# Altium PCB CopterControl.PcbDoc (part 1 of 2)
Units mil, origin at the board's own origin, x right, y up, seen from the top; angles counter-clockwise.
Board outline 1417.32 x 1417.32 mil, 4 copper layers (Top Layer, Ground, Power, Bottom Layer); 93 components, 79 nets, 390 pads, 96 vias.
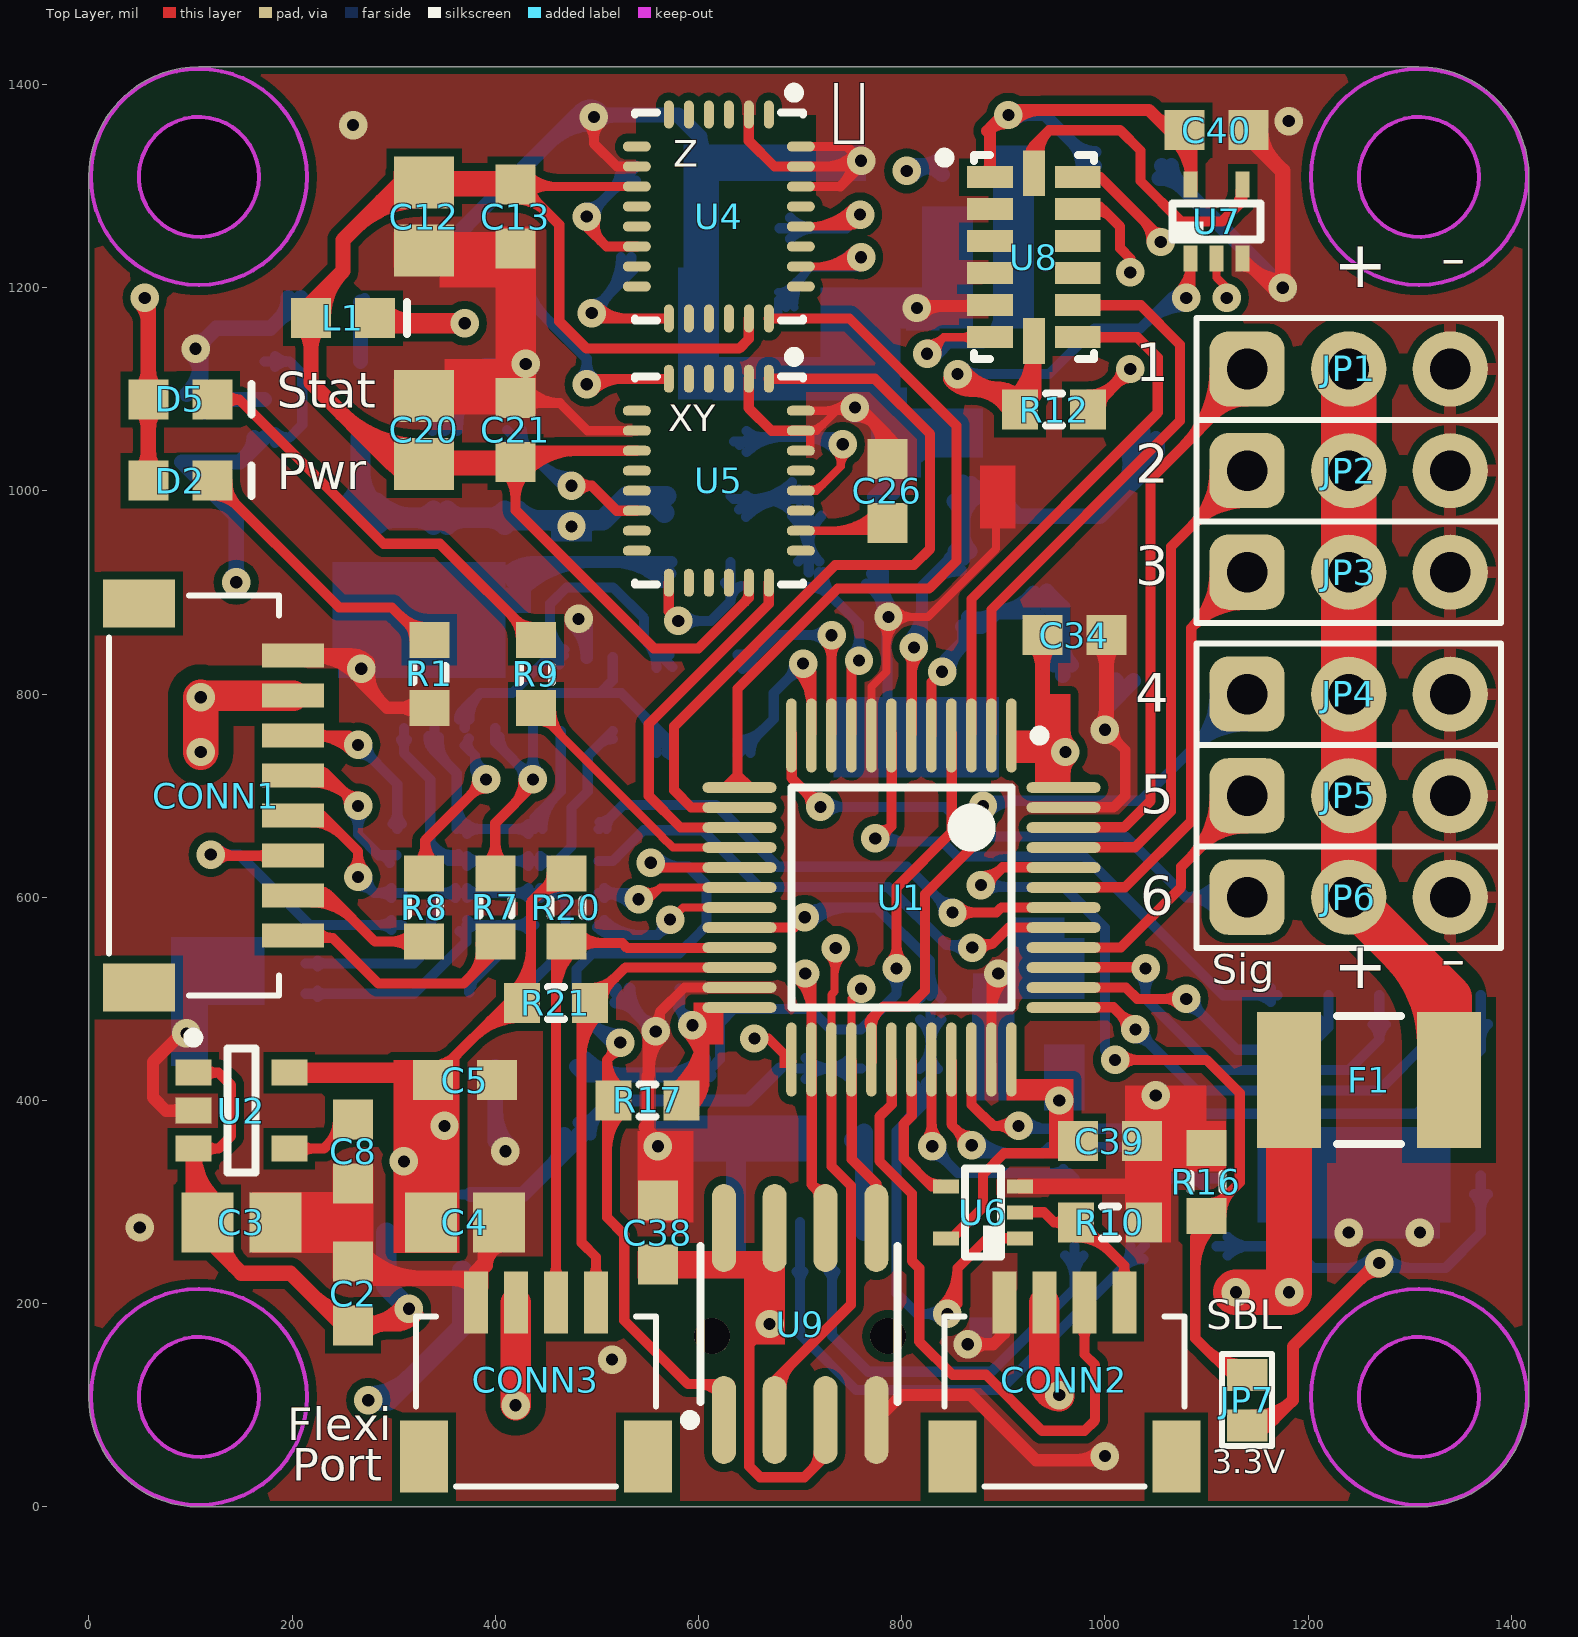
[diagram p0: Top Layer view]
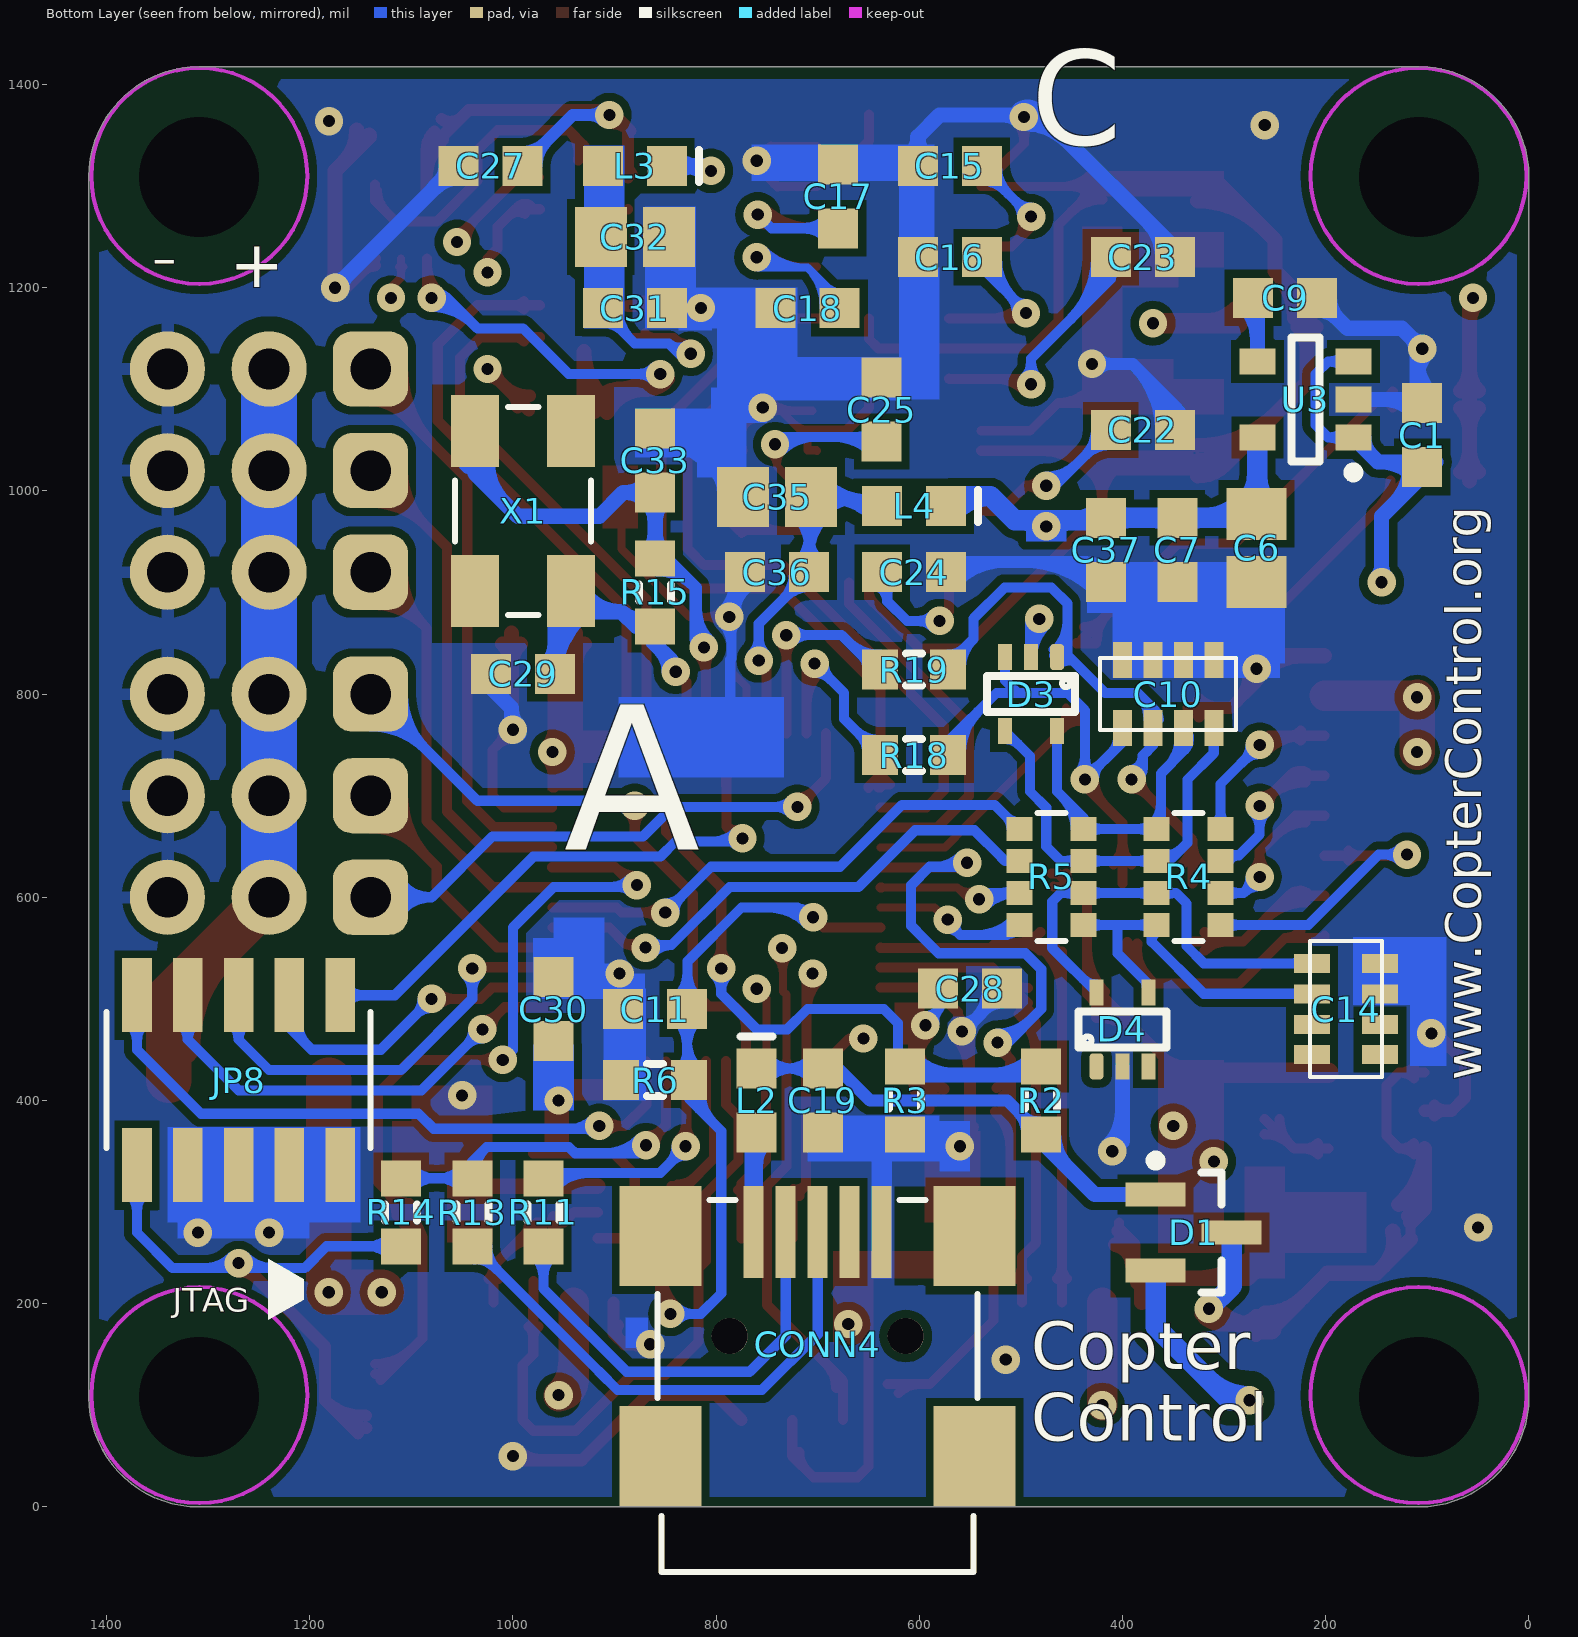
[diagram p1: Bottom Layer view, seen from below]
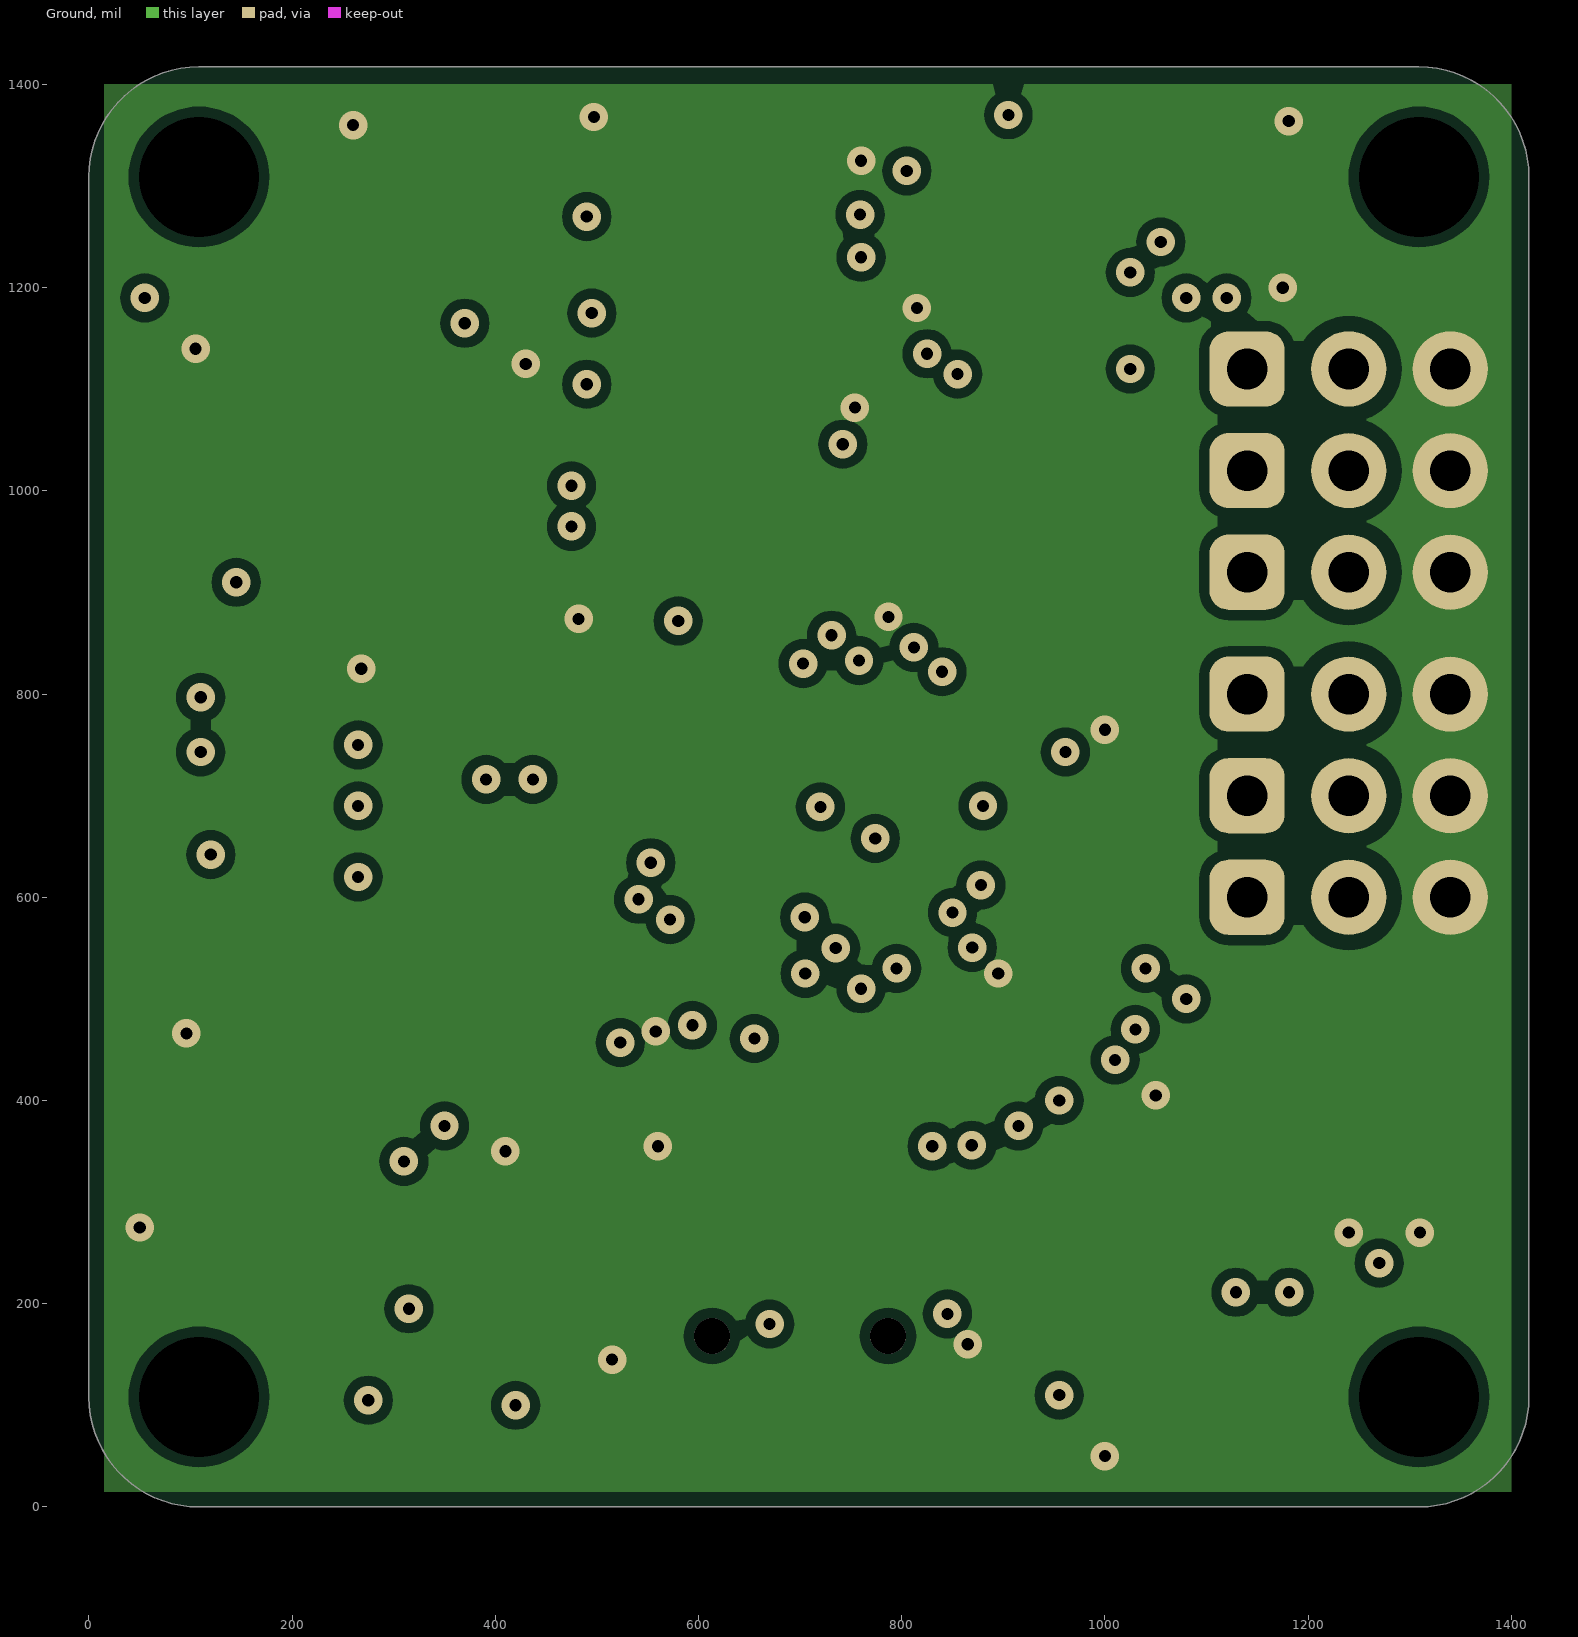
[diagram p2: Ground]
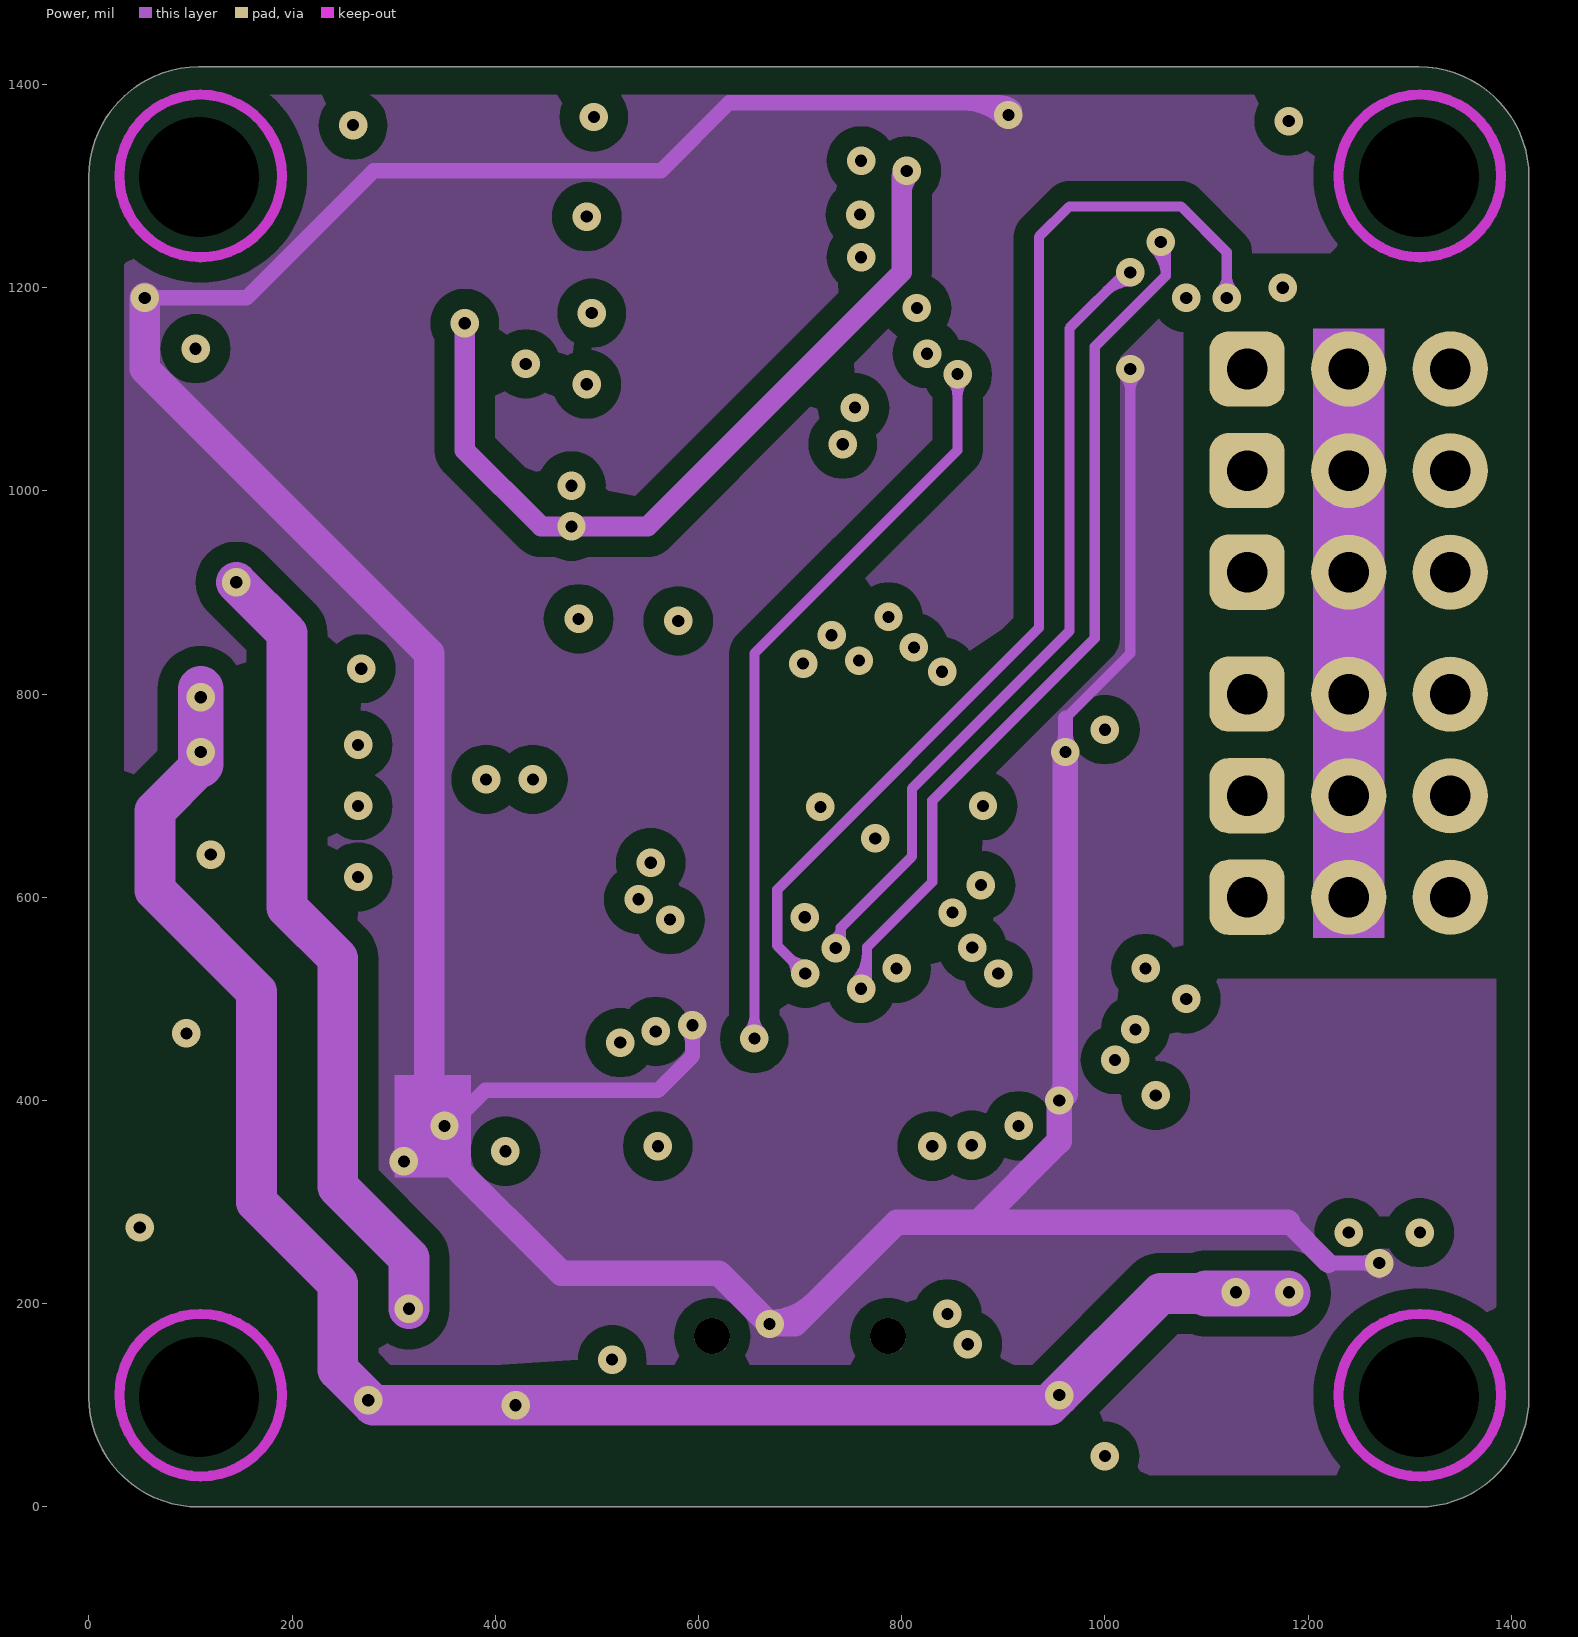
[diagram p3: Power]
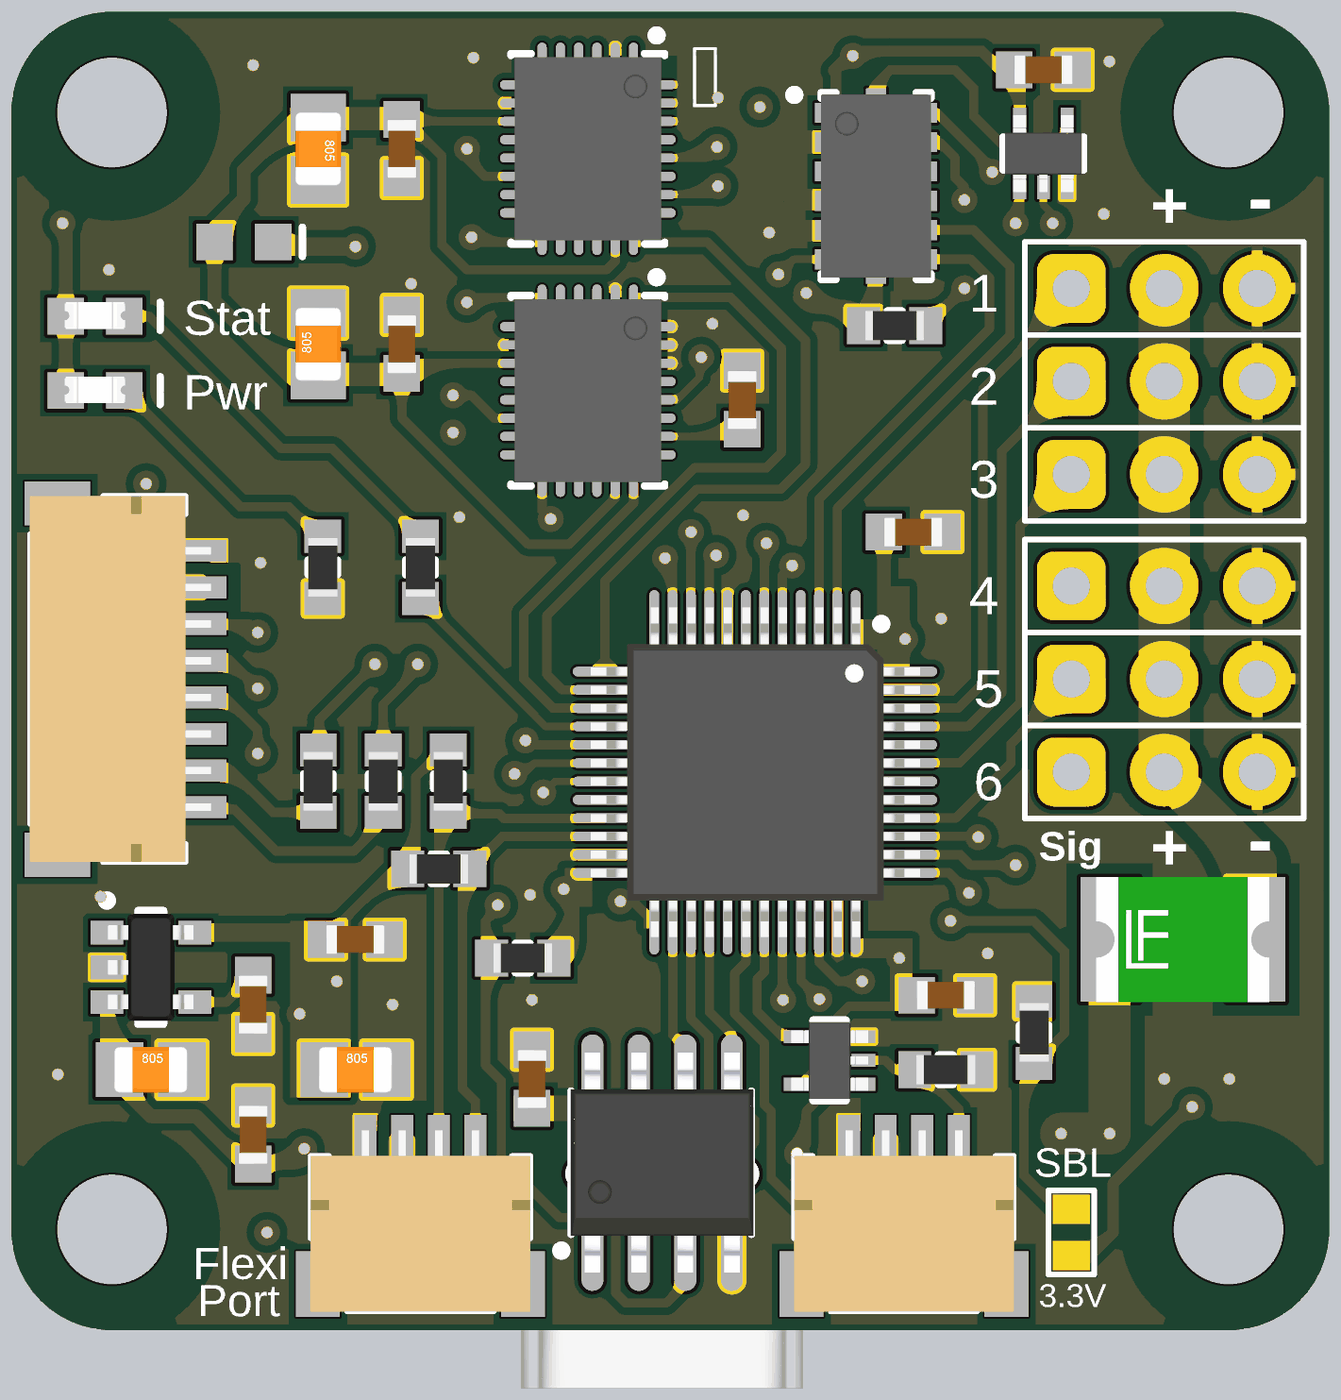
[diagram p5: 3D render of the assembled board from above, using the file's embedded part models]
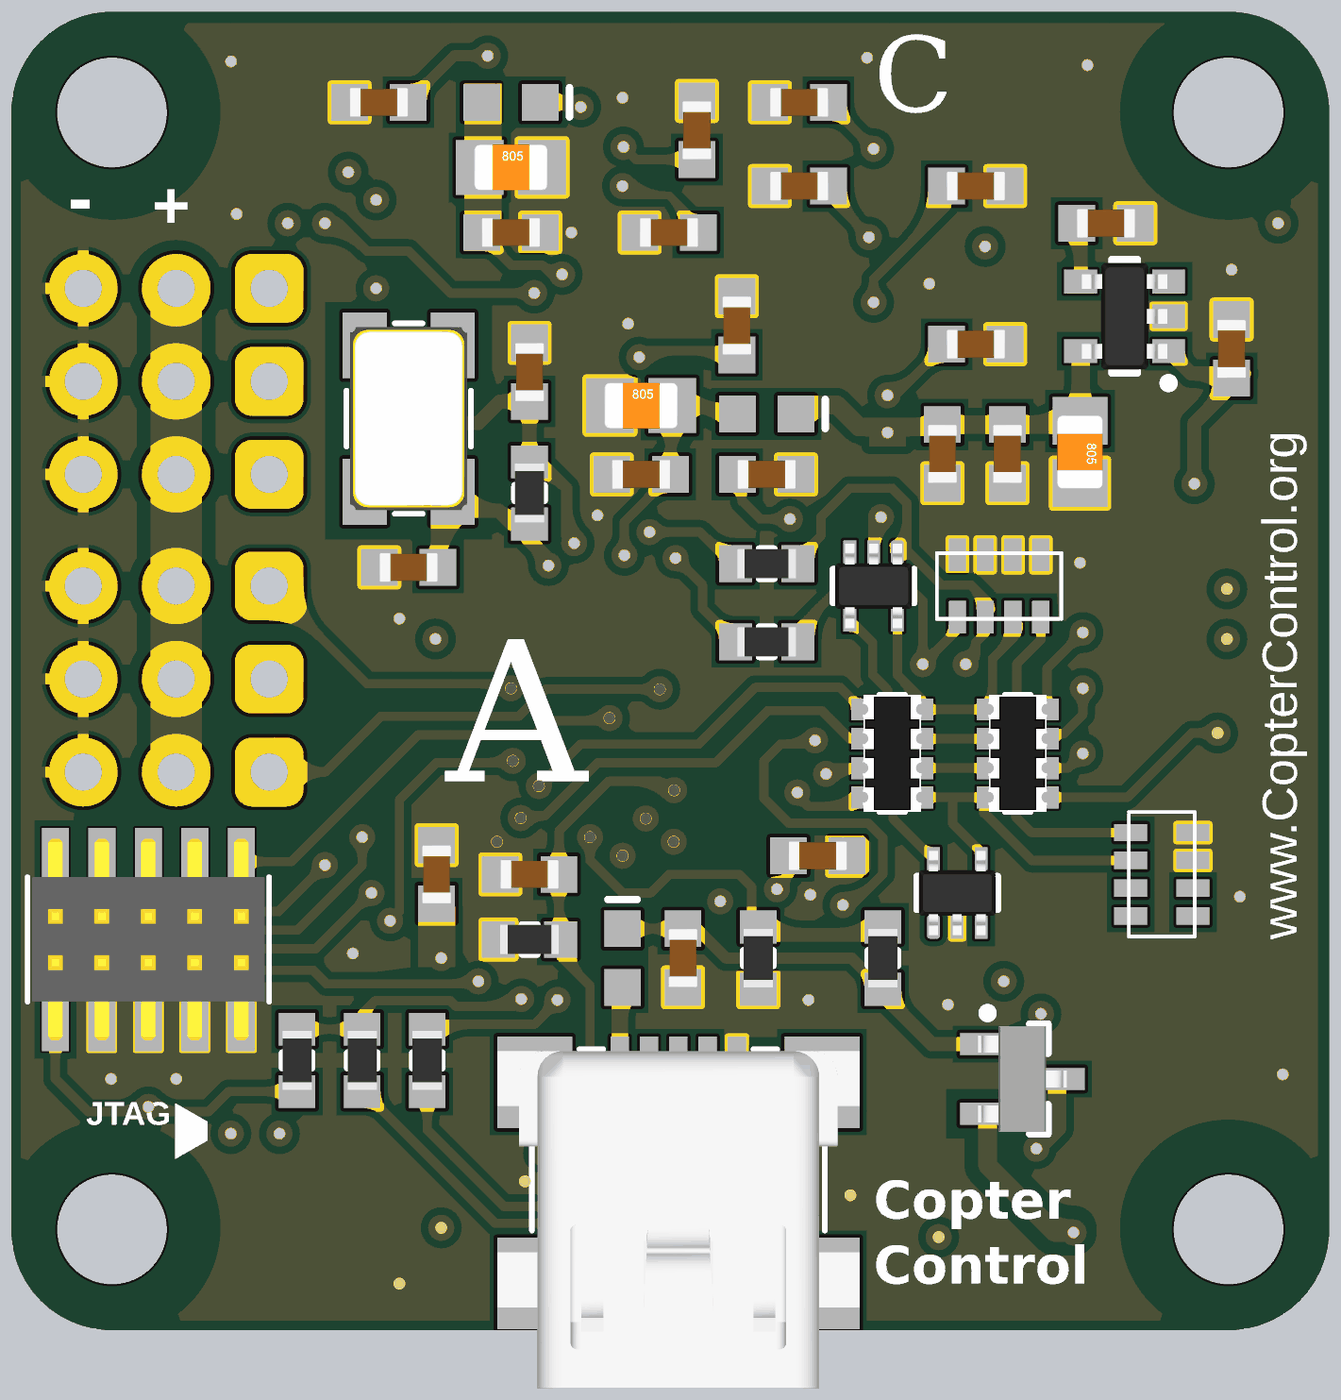
[diagram p6: 3D render of the assembled board from below, using the file's embedded part models]

## Layer stack, top to bottom
Top Layer: signal copper 1.4
Dielectric: core 12.6, FR-4, Dk 4.8
Ground: signal copper 1.4
Dielectric: prepreg 12.6, FR-4, Dk 4.8
Power: signal copper 1.4
Dielectric: core 12.6, FR-4, Dk 4.8
Bottom Layer: signal copper 1.4

## Board outline
0,108.27 0,1309.06 cw(c108.27,1309.06) 108.27,1417.32 1309.06,1417.32 cw(c1309.06,1309.06) 1417.32,1309.06 1417.32,108.27 cw(c1309.06,108.27) 1309.06,0 108.27,0 cw(c108.27,108.27)

## Design rules (kind name [scope] priority, off if disabled: settings)
Clearance "VCC_IN & VCC_UNREG Pour Clearance" [(InNamedPolygon('Top Layer-GND') OR InNamedPolygon('Bottom Layer-GND') OR InNamedPolygon('Ground Layer-GND')) vs (InNet('VCC_IN')OR InNet('VCC_UNREG')) AND NOT (IsVia)] p1: gap=15
Clearance "Ground Layer Pour Clearance" [InNamedPolygon('Ground Layer-GND')] p2: gap=10
Clearance "VCC Pwr Layer Pour Clearance" [InNamedPolygon('Power Layer-VCC')] p3: gap=20
Clearance "Res Array Clearance" [(HasFootprint('TC164'))] p4: gap=6
Clearance [All] p5: gap=8
HoleSize [All] p1: absolutevalues=TRUE maxlimit=1000 minlimit=7.87 maxpercent=80.000 minpercent=20.000
MinimumAnnularRing [All] p1: minimumring=7.87
MinimumSolderMaskSliver [All] p1: minsoldermaskwidth=3
PlaneClearance [All] p1: clearance=15
PlaneConnect [All] p1: planeconnectstyle=Direct reliefexpansion=20 reliefentries=4 reliefconductorwidth=10 reliefairgap=10
PolygonConnect "VCC direct on PWR Layer" [InNet('VCC') vs IsNamedPolygon('Power Layer-VCC')] p1: connectstyle=Direct reliefconductorwidth=10 reliefentries=4 polygonreliefangle="90 Angle"
PolygonConnect "Header Relief" [(HasFootprint('SIP3 - 0.1')) vs IsNamedPolygon('Top Layer-GND') Or  IsNamedPolygon('Bottom Layer-GND')] p2: connectstyle=Relief reliefconductorwidth=12 reliefentries=4 polygonreliefangle="90 Angle"
PolygonConnect [All] p3: connectstyle=Direct reliefconductorwidth=12 reliefentries=4 polygonreliefangle="90 Angle"
RoutingVias [All] p1: holewidth=28 width=50 viastyle="Through Hole" minholewidth=28 minwidth=50 maxholewidth=28 maxwidth=50
SilkToSilkClearance [All] p1: silktosilkclearance=0
SilkscreenOverComponentPads [All] p1: minsilkscreentomaskgap=0
SolderMaskExpansion [All] p1: expansion=4
Width [All] p1: maxlimit=400 minlimit=8 preferedwidth=10
22 further rules are at their usual default settings.

## Components (designator, comment, footprint, x,y, rotation, side; value= is the part's Value field where it differs from the comment)
C1 "Cap603" CAP603N 105,1055 r90 bottom
C2 "Cap603" CAP603N 260,210 r90 top
C3 "Cap805" CAP805N 150,280 r0 top
C4 "Cap805" CAP805N 370,280 r0 top
C5 "Cap603" CAP603N 370,420 r0 top
C6 "Cap805" CAP805N 268,944 r270 bottom
C7 "Cap603" CAP603N 346,942 r270 bottom
C8 "Cap603" CAP603N 260,350 r270 top
C9 "Cap603" CAP603N 240,1190 r180 bottom
C10 "Cap Array 220pF" "CAP ARRAY 0612" 355,800 r90 bottom
C11 "Cap603" CAP603N 860,490 r0 bottom
C12 "Cap805" CAP805N 330,1270 r270 top
C13 "Cap603" CAP603N 420,1270 r270 top
C14 "Cap Array 220pF" "CAP ARRAY 0612" 180,490 r0 bottom
C15 "Cap603" CAP603N 570,1320 r0 bottom
C16 "Cap603" CAP603N 570,1230 r0 bottom
C17 "Cap603" CAP603N 680,1290 r90 bottom
C18 "Cap603" CAP603N 710,1180 r0 bottom
C19 "Cap603" CAP603N 695,400 r270 bottom
C20 "Cap805" CAP805N 330,1060 r90 top
C21 "Cap603" CAP603N 420,1060 r90 top
C22 "Cap603" CAP603N 380,1060 r180 bottom
C23 "Cap603" CAP603N 380,1230 r180 bottom
C24 "Cap603" CAP603N 605,920 r180 bottom
C25 "Cap603" CAP603N 637,1080 r90 bottom
C26 "Cap603" CAP603N 786,1000 r90 top
C27 "Cap603" CAP603N 1022,1320 r180 bottom
C28 "Cap603" CAP603N 550,510 r0 bottom
C29 "Cap603" CAP603N 990,820 r180 bottom
C30 "Cap603" CAP603N 960,490 r270 bottom
C31 "Cap603" CAP603N 880,1180 r180 bottom
C32 "Cap805" CAP805N 880,1250 r180 bottom
C33 "Cap603" CAP603N 860,1030 r270 bottom
C34 "Cap603" CAP603N 970,858 r180 top
C35 "Cap805" CAP805N 740,994 r180 bottom
C36 "Cap603" CAP603N 740,920 r180 bottom
C37 "Cap603" CAP603N 416,942 r90 bottom
C38 "Cap603" CAP603N 560,270 r90 top
C39 "Cap603" CAP603N 1005,360 r0 top
C40 "Cap603" CAP603N 1110,1355 r180 top
CONN1 "RC Input" "JST SH 8 Pin Side Entry" 20,700 r270 top
CONN2 "USART 1" "JST SH 4 Pin Side Entry" 960,20 r0 top
CONN3 "Flexi Port" "JST SH 4 Pin Side Entry" 440,20 r0 top
CONN4 "USB" "USB SMD" 700,50 r180 bottom
D1 "BAT54C" SOT23-3N 330,270 r180 bottom
D2 "Green" LED603N 90,1010 r180 top
D3 "ESD Diode" SOT-353 490,800 r270 bottom
D4 "ESD Diode" SOT-353 400,470 r90 bottom
D5 "Blue" LED603N 90,1090 r180 top
F1 "MF-MSMF030-2" PTC1812N 1260,420 r0 top
JP1 "Servo out 1" "SIP3 - 0.1" 1140,1120 r0 top
JP2 "Servo out 2" "SIP3 - 0.1" 1140,1020 r0 top
JP3 "Servo out 3" "SIP3 - 0.1" 1140,920 r0 top
JP4 "Servo out 4" "SIP3 - 0.1" 1140,800 r0 top
JP5 "Servo out 5" "SIP3 - 0.1" 1140,700 r0 top
JP6 "Servo out 6" "SIP3 - 0.1" 1140,600 r0 top
JP7 "2 PAD Touch JMP" "TOUCH JMP 2PAD - duplicate" 1140,105 r0 top
JP8 "J-TAG" "JTAG Hdr 10-Pin" 1270,420 r180 bottom
L1 "FB 300mA" IND603N 250,1170 r180 top
L2 "FB 300mA" IND603N 760,400 r270 bottom
L3 "FB 300mA" IND603N 880,1320 r0 bottom
L4 "FB 300mA" IND603N 605,985 r0 bottom
R1 "Res603" RES603N 335,820 r90 top
R2 "Res603" RES603N 480,400 r90 bottom
R3 "Res603" RES603N 614,400 r90 bottom
R4 "Res Array 1K 1206" TC164 335,620 r270 bottom
R5 "Res Array 1K 1206" TC164 470,620 r270 bottom
R6 "Res603" RES603N 860,420 r180 bottom
R7 "Res603" RES603N 400,590 r270 top
R8 "Res603" RES603N 330,590 r270 top
R9 "Res603" RES603N 440,820 r270 top
R10 "Res603" RES603N 1005,280 r180 top
R11 "Res603" RES603N 970,290 r270 bottom
R12 "Res603" RES603N 950,1080 r0 top
R13 "Res603" RES603N 1040,290 r270 bottom
R14 "Res603" RES603N 1110,290 r90 bottom
R15 "Res603" RES603N 860,900 r270 bottom
R16 "Res603" RES603N 1100,320 r270 top
R17 "Res603" RES603N 550,400 r180 top
R18 "Res603" RES603N 605,740 r180 bottom
R19 "Res603" RES603N 605,824 r180 bottom
R20 "Res603" RES603N 470,590 r90 top
R21 "Res603" RES603N 459.68,496 r180 top
U1 "STM32F103CBT6" "STM32 48 Lead" 799.76,599.76 r270 top locked
U2 "LP2985-3.3" SOT23-5L 150,390 r0 top
U3 "LP2985-3.3" SOT23-5L 220,1090 r0 bottom
U4 "ISZ-500" "GYRO QFN-28" 620,1270 r270 top
U5 "IDG-500" "GYRO QFN-28" 620,1010 r270 top
U6 "XOR" DCK-5 880,290 r180 top
U7 "OR" DCK-5 1110,1265 r90 top
U8 "ADXL345" ADXL345 930,1230 r0 top
U9 "Flash 4Mbits" SOIC8_N 700,180 r90 top
X1 "8MHz SMD XTal" "XTAL ACT530SMX-4 Series" 990,980 r270 bottom

## Footprints (in the part's own frame and the unit in brackets; to place one, negate y for a bottom-side part, rotate by r counter-clockwise, add the part's x,y. Pads: shape width x height; smd on the part's side, far side on the other; paste and mask are expansions set on the pad)
ADXL345 [mm] "ADXL 345 Accel ADXL345BCCZ"
  rect 1.145x0.55 smd mask+0.075: 1(-1.098,2) 2(-1.098,1.2) 3(-1.098,0.4) 4(-1.098,-0.4) 5(-1.098,-1.2) 6(-1.098,-2) 8(1.098,-2) 9(1.098,-1.2) 10(1.098,-0.4) 11(1.098,0.4) 12(1.098,1.2) 13(1.098,2)
  rect 0.55x1.145 smd mask+0.075: 7(0,-2.097) 14(0,2.097)
  silkscreen extent -2.36,-2.55 1.5,2.61, body extent -1.5,-2.5 1.5,2.5, height 0.93
CAP603N [mm] "Chip Capacitor, Body 1.6x0.8mm, IPC Medium Density"
  rect 1x1 smd: 1(-0.8,0) 2(0.8,0)
  body extent -0.8,-0.4 0.8,0.4, height 0.77
CAP805N [mm] "Chip Capacitor, Body 2.0x1.3mm, IPC Medium Density"
  rect 1.3x1.5 smd: 1(-0.85,0) 2(0.85,0)
  body extent -1,-0.62 1,0.63, height 0.78
"CAP ARRAY 0612" [mm]
  rect 0.9x0.475 smd mask+0.085: 1(-0.85,1.14) 2(-0.85,0.38) 3(-0.85,-0.38) 4(-0.85,-1.14) 5(0.85,-1.14) 6(0.85,-0.38) 7(0.85,0.38) 8(0.85,1.14)
  silkscreen extent -0.9,-1.7 0.9,1.7, body extent -0.9,-1.7 0.9,1.7, height 1.35
DCK-5 [mm] "SOT23-DCK, 5-Leads, Body 2.2x2.4mm (max), Pitch 0.65mm, IPC High Density"
  rect 0.65x0.35 smd mask+0.076: 1(-0.925,0.65) 2(-0.925,0) 3(-0.925,-0.65) 4(0.925,-0.65) 5(0.925,0.65)
  silkscreen extent -0.45,-1.1 0.45,1.1, body extent -1.05,-1.05 1.05,1.05, height 1
"GYRO QFN-28" [mm] "Invensense Gyro QFN, 28-Leads, Body 4.2x5.2mm (max), Pitch 0.50mm, IPC Medium Density"
  oval 0.7x0.25 smd mask+0.061: 1(-2.55,1.25) 2(-2.55,0.75) 3(-2.55,0.25) 4(-2.55,-0.25) 5(-2.55,-0.75) 6(-2.55,-1.25) 15(2.55,-1.25) 16(2.55,-0.75) 17(2.55,-0.25) 18(2.55,0.25) 19(2.55,0.75) 20(2.55,1.25)
  oval 0.25x0.7 smd mask+0.061: 7(-1.75,-2.05) 8(-1.25,-2.05) 9(-0.75,-2.05) 10(-0.25,-2.05) 11(0.25,-2.05) 12(0.75,-2.05) 13(1.25,-2.05) 14(1.75,-2.05) 21(1.75,2.05) 22(1.25,2.05) 23(0.75,2.05) 24(0.25,2.05) 25(-0.25,2.05) 26(-0.75,2.05) 27(-1.25,2.05) 28(-1.75,2.05)
  silkscreen extent -3.22,-2.1 2.6,2.1, body extent -2.5,-2 2.5,2, height 1.13
IND603N [mm] "Chip Inductor, Body 1.6x0.8mm, IPC Medium Density"
  rect 1x1 smd: 1(-0.8,0) 2(0.8,0)
  silkscreen extent -1.6,-0.4 -1.6,0.4, body extent -0.87,-0.48 0.87,0.48, height 0.71
"JST SH 4 Pin Side Entry" [mm] "SM04B-SRSS-TB"
  rect 1.2x1.8 smd paste+0 mask+0.051: 0(-2.8,0.75) 0(2.8,0.75)
  rect 0.6x1.55 smd paste+0 mask+0.051: 1(-1.5,4.6) 2(-0.5,4.6) 3(0.5,4.6) 4(1.5,4.6)
  silkscreen extent -3,0 3,4.25, body extent -3,0 3,4.95, height 2.92
"JST SH 8 Pin Side Entry" [mm] "SM08B-SRSS-TB"
  rect 1.2x1.8 smd paste+0 mask+0.051: 0(-4.8,0.75) 0(4.8,0.75)
  rect 0.6x1.55 smd paste+0 mask+0.051: 1(-3.5,4.6) 2(-2.5,4.6) 3(-1.5,4.6) 4(-0.5,4.6) 5(0.5,4.6) 6(1.5,4.6) 7(2.5,4.6) 8(3.5,4.6)
  silkscreen extent -5,0 5,4.25, body extent -5,0 5,4.95, height 2.92
"JTAG Hdr 10-Pin" [mm] "10-Pin SMT plug"
  rect 0.74x1.85 smd mask+0.051: 1(-2.54,-2.125) 2(-2.54,2.125) 3(-1.27,-2.125) 4(-1.27,2.125) 5(0,-2.125) 6(0,2.125) 7(1.27,-2.125) 8(1.27,2.125) 9(2.54,-2.125) 10(2.54,2.125)
  silkscreen extent -3.3,-1.7 3.3,1.7, body extent -3.18,-2.75 3.17,2.75, height 4.48
LED603N [mm] "Chip LED, Body 1.6x0.8mm, IPC Medium Density"
  rect 1x1 smd: 1(-0.8,0) 2(0.8,0)
  silkscreen extent -1.78,-0.38 -1.78,0.38, body extent -0.82,-0.38 0.82,0.34, height 0.68
PTC1812N [mm] "Chip Inductor, Body 4.5x3.2mm, IPC Medium Density"
  rect 1.6x3.4 smd: 1(-2,0) 2(2,0)
  silkscreen extent -0.8,-1.6 0.8,1.6, body extent -2.36,-1.7 2.37,1.71, height 1.34
RES603N [mm] "Chip Resistor, Body 1.6x0.8mm, IPC Medium Density"
  rect 0.9x1 smd: 1(-0.85,0) 2(0.85,0)
  silkscreen extent -0.2,-0.4 0.2,0.4, body extent -0.8,-0.4 0.8,0.4, height 0.44
"SIP3 - 0.1" [mil] "Standard 0.1 3 Pin Header"
  rrect50% 74x74 hole 40: 1(0,0)
  round 74 hole 40: 2(100,0) 3(200,0)
  silkscreen extent -50,-50 250,50, body extent -47,-47 248,47, height 394
SOIC8_N [mm] "8-Pin Small Outline Integrated Circuit Package (SOIC8), IPC Medium Density"
  oval 2.2x0.6 smd: 1(-2.4,1.905) 2(-2.4,0.635) 3(-2.4,-0.635) 4(-2.4,-1.905) 5(2.4,-1.905) 6(2.4,-0.635) 7(2.4,0.635) 8(2.4,1.905)
  silkscreen extent -2.52,-2.44 1.96,2.88, body extent -3.01,-2.5 3.01,2.5, height 1.75
SOT23-3N [mm] "SOT23, 3-Leads, Body 2.9x1.3mm, Pitch 0.95mm, Lead Span 2.5mm, IPC Medium Density"
  rect 1.5x0.6 smd: 1(-0.95,0.95) 2(-0.95,-0.95) 3(0.95,0)
  silkscreen extent -1.07,-1.5 0.7,1.92, body extent -1.21,-1.45 1.21,1.45, height 0.99
SOT23-5L [mm] "SOT23, 5-Leads, Body 2.9x1.6mm, Pitch 0.95mm, Lead Span 2.8mm, IPC High Density"
  rect 0.9x0.65 smd mask+0.076: 1(-1.2,0.95) 2(-1.2,0) 3(-1.2,-0.95) 4(1.2,-0.95) 5(1.2,0.95)
  silkscreen extent -1.32,-1.55 0.35,1.95, body extent -1.17,-1.46 1.17,1.46, height 0.97
SOT-353 [mm]
  rrect50% 0.65x0.35 smd mask+0.076: 1(-0.925,0.65)
  rect 0.65x0.35 smd mask+0.076: 2(-0.925,0) 3(-0.925,-0.65) 4(0.925,-0.65) 5(0.925,0.65)
  silkscreen extent -0.45,-1.1 0.45,1.1, body extent -1.15,-1.05 1.15,1.05, height 1
"STM32 48 Lead" [mm] "Thin QFP, 48-Leads, Body 7x7mm, Pitch 0.5mm, IPC Medium Density"
  oval 1.85x0.265 smd mask+0.076: 1(-4.05,2.75) 2(-4.05,2.25) 3(-4.05,1.75) 4(-4.05,1.25) 5(-4.05,0.75) 6(-4.05,0.25) 7(-4.05,-0.25) 8(-4.05,-0.75) 9(-4.05,-1.25) 10(-4.05,-1.75) 11(-4.05,-2.25) 12(-4.05,-2.75) 25(4.05,-2.75) 26(4.05,-2.25) 27(4.05,-1.75) 28(4.05,-1.25) 29(4.05,-0.75) 30(4.05,-0.25) 31(4.05,0.25) 32(4.05,0.75) 33(4.05,1.25) 34(4.05,1.75) 35(4.05,2.25) 36(4.05,2.75)
  oval 0.265x1.85 smd mask+0.076: 13(-2.75,-4.05) 14(-2.25,-4.05) 15(-1.75,-4.05) 16(-1.25,-4.05) 17(-0.75,-4.05) 18(-0.25,-4.05) 19(0.25,-4.05) 20(0.75,-4.05) 21(1.25,-4.05) 22(1.75,-4.05) 23(2.25,-4.05) 24(2.75,-4.05) 37(2.75,4.05) 38(2.25,4.05) 39(1.75,4.05) 40(1.25,4.05) 41(0.75,4.05) 42(0.25,4.05) 43(-0.25,4.05) 44(-0.75,4.05) 45(-1.25,4.05) 46(-1.75,4.05) 47(-2.25,4.05) 48(-2.75,4.05)
  silkscreen extent -4.17,-2.75 2.75,3.58, body extent -4.5,-4.49 4.5,4.51, height 1.56
TC164 [mm] "4-Resistor Array"
  rect 0.6x0.65 smd mask+0.064: 1(-1.2,-0.8) 2(-0.4,-0.8) 3(0.4,-0.8) 4(1.2,-0.8) 5(1.2,0.8) 6(0.4,0.8) 7(-0.4,0.8) 8(-1.2,0.8)
  silkscreen extent -1.6,-0.35 1.6,0.35, body extent -1.6,-0.8 1.6,0.8, height 0.55
"TOUCH JMP 2PAD - duplicate" [mil] "Touch Jumper 2 Pad"
  rect 40x31.5 smd paste-40 mask+0: 1(0,25) 2(0,-25)
  silkscreen extent -25,-45 25,45
"USB SMD" [mm] "DX2R005HN2E700"
  rect 2.05x2.5 smd: 0(-3.925,0) 0(-3.925,5.5) 0(3.925,0) 0(3.925,5.5)
  rect 0.5x2.3 smd mask+0.085: 1(-1.6,5.6) 2(-0.8,5.6) 3(0,5.6) 4(0.8,5.6) 5(1.6,5.6)
  round 0.9 hole 0.9 unplated: 6(-2.2,3) 6(2.2,3)
  silkscreen extent -4,-2.9 4,6.4, body extent -4.95,-2.85 4.95,6.35, height 4.17
"XTAL ACT530SMX-4 Series" [mm] "ACT530SMX-4Series from ACT"
  rect 1.8x1.2 smd: 1(-2,-1.2) 2(2,-1.2) 3(2,1.2) 4(-2,1.2)
  silkscreen extent -2.6,-1.7 2.6,1.7, body extent -2.5,-1.6 2.5,1.6, height 1

## Part data
C1 C2 C3 C4 C5 C6 C7 C8 C9 C11 C12 C13 C15 C16 C17 C18 C19 C20 C21 C22 C23 C24 C25 C26 C27 C28 C29 C30 C31 C32 C33 C34 C35 C36 C37 C38 C39 C40: "Capacitor SMD"
C10 C14: "Capacitor array, 4 * 220pF"
CONN1: library part "JST-SH 8-pin Side Entry Socket", "JST-SH 8-pin Side Entry Socket"
CONN2 CONN3: library part "JST-SH 4-pin Side Entry Socket", "JST-SH 4-pin Side Entry Socket"
CONN4: library part USB_SMT_B, "USB Type-B SMT Socket"
D1: "Dual Diode Command Cathode"
D2: library part "LED 603 Gr", "Green 603 LED"
D3 D4: library part "Quad ESD Diode 3.3V", "Quad ESD Protection, 3.3V, PESD3V3L4UG,115"
D5: library part "LED 603 Bl", "Blue 603 LED"
F1: library part "PTC 30V 10A SMD", "PTC 30V 10A SMD"
JP1 JP2 JP3 JP4 JP5 JP6: library part "Hdr 3 Pin 0.1", "Header, 3-Pin, 0.1\""
JP7: "2 Pad Touch Jumper"
JP8: library part "J-TAG Connector", "Header, 5-Pin, Dual row"
L1 L2 L3 L4: library part FerriteBead_300mA, "Ferrite Bead 300mA"
R1 R2 R3 R6 R7 R8 R9 R10 R11 R12 R13 R14 R15 R16 R17 R18 R19 R20 R21: "Resistor SMD"
R4 R5: library part "Res Array 1K", "4 Resistor Array"
U1: "STM32 ARM-based 32-bit MCU with 128 Kbytes Flash, 48-pin LQFP, Industrial Temperature"
U2 U3: "3.3V 150mA LDO Regulator"
U4: library part "Gyro ISZ-500", "Invensense ISZ-500 Z Axis Gyro"
U5: library part "Gyro IDG-500", "Invensense IDG-500 XY Axis Gyro"
U6: library part "XOR SN74LVC1G86DCKR", "XOR Gate SN74LVC1G86DCKR"
U7: library part "OR SN74AHC1G32DCKR", "OR Gate SN74AHC1G32DCKR"
U8: library part "Accel ADXL345", "Analog Devices ADXL345 Accel"
U9: library part "Flash W25X40BVSNIG", "4Mbit SPI Flash Memory"
X1: library part "XTAL ACT530SMX-4", "SMD Quartz Crystal 8Mhz"

## Free pads (board coordinates)
  round 114.17 hole 118.11 unplated: 0(108.27,108.27) 0(108.27,1309.06) 0(1309.06,108.27) 0(1309.06,1309.06)

## Via types
v1: diameter 28, hole 12, Top Layer to Bottom Layer, tented both sides, 96 vias

## Nets (pads, with @x,y where several pads share a name; then routed paths per layer and width w, separated by ;. In a path a pad name is that pad's centre, name@x,y a point inside that pad or via, vN(x,y) a via of type N, cw(c..) or ccw(c..) an arc to the next point about the centre after c; other vN are vias at no path point)
BOOT: JP7.1 R16.2 U1.44 | length 1123.3
  Top Layer w10: v1@878.22,621 ccw(c878.92,650.14) 899.53,629.53 ; v1@880,610 899.53,629.53 ; v1@887,612 cw(c899.07,612) 890.54,620.54 ; U1.44@961.42,629.53 899.53,629.53 ; v1(1010,440) 1100,440 1132.69,407.31 1132.69,319.22 R16.2@1100,286.54 ; v1@1016.36,433.64 cw(c1031.73,418.27) 1031.73,440 cw(c1031.73,461.73) v1@1016.36,446.36 ; 1089,234.03 cw(c1150.54,234.03) R16.2@1107.02,277.54 ; 1089,258.17 cw(c1126.39,258.17) R16.2@1099.95,284.61 ; 1089,263.68 cw(c1099.17,263.68) R16.2@1098.66,273.83 ; 1099.05,155.95 ccw(c1135.75,192.64) JP7.1@1135.75,140.75 ; R16.2@1101.97,299.25 ccw(c1101.97,325.2) 1120.32,306.85 ; R16.2@1110,286.54 1089,265.54 1089,166 JP7.1@1130,125 ; R16.2@1114.69,286.54 cw(c1150.14,286.54) 1125.07,311.6 ; 1116.12,138.88 ccw(c1135.75,158.5) JP7.1@1135.75,130.75
  Bottom Layer w10: v1@880,610 960,610 1000,570 1000,450 v1(1010,440) ; v1@884.36,605.64 cw(c894.9,595.1) 894.9,610 ; v1@884.36,618.36 ccw(c904.56,638.56) 904.56,610
  other v1: 878,612
CS_FLSH: R17.2 U1.17 U9.1 | length 1110.7
  Top Layer w10: 510,351.55 cw(c563.01,351.55) R17.2@525.53,389.04 ; 510,375.7 cw(c538.87,375.7) R17.2@518.46,396.11 ; 510,420.24 ccw(c529.96,420.24) R17.2@518.14,404.16 ; 512,442 ccw(c504.08,449.92) v1@514.57,453.85 ; 514.46,444.46 cw(c523,435.93) v1@523,448 ; R17.2@524.06,412.22 cw(c544.47,440) 510,440 ; v1@525,455 510,440 ; v1@548.72,629.28 U1.17@638.34,629.28 ; 598.92,121 cw(c598.92,90.93) U9.1@620.18,112.19 ; U9.1@631,121 589.51,121 527,183.51 527,268 510,285 510,440
  Bottom Layer w10: 490.56,479.44 ccw(c523,511.87) v1@523,466 ; 503.8,545 581.1,545 602,565.9 ; 505,545 495.75,545 480,529.25 480,490 515,455 v1@525,455 ; 507.64,462.36 ccw(c523,477.73) v1@523,456 ; v1@559.36,640.36 ccw(c584.38,665.38) 584.38,630 ; v1@560,629.28 548.72,629.28 548.72,630 590,630 608,612 608,572 602,566
  other v1: 523,457 553,634
GND: C1.2 C2.2 C3.2 C4.2 C5.2 C6.2 C7.2 C8.2 C9.2 C10.5 C10.6 C10.7 C10.8 C11.2 C12.2 C13.2 C14.3 C14.4 C15.2 C16.2 C17.2 C18.2 C19.2 C20.2 C21.2 C22.2 C23.2 C24.2 C25.2 C26.2 C27.1 C28.1 C29.1 C30.1 C31.2 C32.2 C33.1 C34.1 C35.1 C36.1 C37.1 C38.2 C39.2 C40.1 CONN1.1 CONN2.1 CONN3.1 CONN4.5 D3.2 D4.2 JP1.3 JP2.3 JP3.3 JP4.3 JP5.3 JP6.3 JP8.3 JP8.5 JP8.7 JP8.9 R1.1 R3.1 R6.1 R10.1 R16.1 U1.8 U1.23 U1.35 U1.47 U2.2 U3.2 U4.2 U4.8 U4.26 U4.27 U4.28 U5.2 U5.8 U5.26 U5.27 U5.28 U6.3 U7.3 U8.2 U8.4 U8.5 U9.4 | length 7434.5
  Top Layer w8: U5.26@700.71,1039.53 701.18,1040 710,1040 710,1058.9 U5.27@710.32,1059.21 ; U5.27@700.71,1059.21 716.34,1059.21 736.02,1078.9 ; U5.28@705,1078.9 v1@759,1078.9 ; U5.27@709.57,1060.13 ccw(c709.57,1078.71) 722.7,1065.57 ; 722.37,1078.9 ccw(c722.37,1113.63) v1@746.93,1089.07 ; 737.35,1078.9 cw(c737.35,1065.35) v1@746.93,1074.93 ; U1.8@770.23,761.17 770.23,807.23 785,822 v1@785,876 ; v1@779.93,868.93 cw(c767.69,856.69) 785,856.69 ; v1@784,879 v1@785,878 ; 785,847.03 cw(c815.97,847.03) 794.07,868.93 cw(c811.14,851.86) 811.14,876 cw(c811.14,900.14) v1@794.07,883.07 ; v1(787,876) 826,876 893,943 893,973
  Top Layer w9: 463.5,1086.5 490.79,1059.21 U5.8@539.29,1059.21 ; U4.26@700.71,1299.53 739.53,1299.53 ; U4.28@700.71,1338.9 746.1,1338.9
  Top Layer w10: C4.2@403.46,271.57 C4.2@403.46,280 ; C21.2@415,1086.5 463.5,1086.5 cw(c463.5,1129.72) C21.2@431.03,1101.19 ; C21.2@423.52,1094.59 ccw(c441.4,1110.3) 441.4,1086.5 ; C21.2@430.38,1081.11 cw(c443.38,1068.11) 443.38,1086.5 ; v1@490.64,1361.64 cw(c475.27,1346.27) 497,1346.27 cw(c518.73,1346.27) v1@503.36,1361.64 ; v1(497,1368) 497,1342 519.79,1319.21 U4.8@539.29,1319.21 ; v1@550,355 v1@560,345 ; v1@554.74,476.39 ccw(c550.62,487) 562,487 ; v1@562,462 562,487 ; U1.23@638.34,511.17 586.17,511.17 562,487 ; U5.2@649.53,1110.39 649.53,1081.47 671.79,1059.21 U5.27@700.71,1059.21 U5.27@710.32,1059.21 ; U4.2@649.53,1370.39 649.53,1344.47 674.79,1319.21 U4.27@700.71,1319.21 759.21,1319.21 739.53,1299.53 ; 724.3,1319.21 ccw(c724.3,1360.7) v1@753.64,1331.36 ; 742.03,1302.03 ccw(c720.32,1323.74) v1@751,1324.71 ; 746.1,1338.9 v1@756,1329 ; U8.2@886.79,1277.24 U8.2@887,1277.04 ; U1.35@888.34,438.34 888.34,523.34 895,530 897.83,527.17 897.83,526.92 895,524.09 v1@895,520 ; 888.34,487.19 cw(c932.81,487.19) v1@901.36,518.64 ; 888.34,511.33 cw(c908.67,511.33) v1@894.29,525.71 ; U1.47@961.42,688.58 1008.58,688.58 1020,700 1020,745 v1(1000,765) ; v1@1000,756 cw(c1000,734.27) 1015.36,749.64 cw(c1030.73,765) v1@1009,765 ; 1039.41,315.59 1040,315
  Top Layer w12: U2.2@93.03,385.19 ccw(c81.43,373.59) 81.43,390 ccw(c81.43,406.41) U2.2@93.03,394.81 ; v1(96,466) 91.04,466 63,437.96 63,403 76,390 U2.2@102.76,390 ; v1@264.02,825.42 ccw(c281.91,823.53) 269.19,810.81 ; v1(268,825) 268,812 293.46,786.54 R1.1@335,786.54 ; v1@275.96,824.16 ccw(c314.05,820.13) 286.96,793.04 ; R1.1@324.75,778.25 ccw(c304.75,758.25) 304.75,786.54 ccw(c304.75,814.82) R1.1@324.75,794.82 ; C20.2@325,1088.46 C20.2@336.97,1088.46 ; C12.2@325,1231.54 C12.2@336.97,1231.54 ; CONN3.1@370.94,225 CONN3.1@380.94,215 ; 547,374 cw(c533.54,360.54) v1@552.17,356.64 ; v1@550,355 558,363 550,371 550,424 551,425 551,463 v1@559,471 ; 551,431.79 cw(c594.21,431.79) v1@563.66,462.34 ; v1@754,1074 cw(c754,1045.03) 774.49,1065.51 ; v1@758,1079 758,1080 759,1081 785,1055 ; 767.82,1072.18 cw(c727.98,1032.34) C26.2@784.32,1031.52 ; 773.75,1066.25 cw(c759.76,1052.27) C26.2@775.27,1039.99 ; U9.4@775,85.51 799.49,110 868.15,110 932.15,46 v1@1000,46 ; C26.2@778.49,1042.94 ccw(c770.57,1055) 785,1055 ; 783.28,1056.72 cw(c770.4,1043.85) C26.2@784.68,1032.54 ; C26.2@785,1039.5 785,1055 ; 787.89,1052.11 cw(c767.55,1031.77) C26.2@796.31,1031.35 ; C26.2@792,1043.8 cw(c797.47,1055) 785,1055 ; v1@816.88,1181.88 U8.5@886.79,1181.88 ; v1@820.66,1174.34 cw(c838.84,1156.16) 838.84,1181.88 ; v1@820.66,1185.66 ccw(c829.79,1194.79) 829.79,1181.87 ; 861.3,1181.87 ccw(c861.3,1196.54) U8.5@871.67,1186.17 ; v1(865,160) 890,160 900.94,170.94 CONN2.1@900.94,201.1 ; v1@870.66,154.34 cw(c884.31,140.69) 884.31,160 cw(c884.31,179.31) v1@870.66,165.66 ; 895.73,165.73 ccw(c888.83,172.63) CONN2.1@896.42,178.75 ; 971.03,46 ccw(c971.03,78.97) v1@994.34,55.66 ; U7.3@1135.59,1221.79 cw(c1135.59,1205.38) 1147.19,1216.98 ; U7.3@1135.59,1228.58 v1@1169.59,1194.59 ; 1142.86,1221.31 ccw(c1175,1253.45) v1@1175,1208
  Top Layer w15: CONN1.1@201.1,837.8 255.2,837.8 v1(268,825) ; CONN1.1@221.42,837.8 cw(c221.42,778.42) v1@263.4,820.4 ; 257.63,837.8 cw(c257.63,814.63) v1@274.01,831.01 ; C2.2@258.01,239.51 ccw(c293.03,274.53) 293.03,225 ; C2.2@260,241.5 276.5,225 CONN3.1@370.94,225 ; C2.2@268.62,250.11 ccw(c329.24,310.74) 329.24,225 ; 357.99,225 cw(c357.99,196.85) CONN3.1@377.9,216.75 ; CONN3.1@380.94,201.1 380.94,215 380.94,230.94 390,240 ; CONN3.1@385.09,220.99 cw(c403.67,226.33) 390,240 ; 390,237.57 cw(c411.17,237.57) C4.2@407.01,258.32 ; C4.2@403.46,271.57 390,258.11 390,240 ; C38.2@551.38,310.11 ccw(c530.58,330.91) 560,330.91 ccw(c589.42,330.91) C38.2@568.62,310.11 ; v1@555.4,350.4 cw(c544.31,339.31) 560,339.31 cw(c575.69,339.31) v1@564.6,350.4 ; C38.2@560,301.5 v1@560,345 ; v1(815,1180) v1@816.88,1181.88 ; U6.3@916.42,315.59 1039.41,315.59 ; C34.1@992.88,849.38 cw(c972.08,828.58) 1001.5,828.58 cw(c1030.91,828.58) C34.1@1010.11,849.38 ; v1@995.4,769.6 ccw(c980.7,784.3) 1001.5,784.3 ; v1@1001.5,760 C34.1@1001.5,860 ; C40.1@1141.5,1350 1141.5,1348.5 1175,1315 v1(1175,1200) ; C40.1@1153.68,1355 ccw(c1198.78,1355) 1166.89,1323.11 ; v1@1170.4,1204.6 ccw(c1159.31,1215.69) 1175,1215.69 ccw(c1190.69,1215.69) v1@1179.6,1204.6
  Bottom Layer w8: 786,790 794,782 ; v1@786,875 v1(787,876)
  Bottom Layer w10: 400,360 v1(410,350) ; v1@781.01,869.28 cw(c771.1,858.16) 786,858.16 ; 785,849.44 cw(c813.56,849.44) v1@793.36,869.64 ; 785,857.08 cw(c797.77,857.08) v1@791.45,868.18 ; 786,790 786,833.82 785,834.82 785,857.18 786,858.18 ; v1@786,875 786,858.18 ; v1@791.7,868.32 ccw(c797.92,858.16) 786,858.16 ; v1@895,520 895,524.09 897.83,526.92 897.83,527.17 v1@895,530 ; v1@780.64,869.64 cw(c770.1,859.1) 785,859.1 ccw(c770.1,859.1) v1@780.64,869.64
  Bottom Layer w12: v1(105,1140) v1@110,1135 ; C1.2@110,1091.5 C1.2@111.5,1090 ; C22.2@338.19,1060 cw(c370.03,1060) 347.51,1082.51 ; C22.2@348.5,1060 348.5,1083.5 390,1125 v1(430,1125) ; C22.2@350.19,1060 cw(c411,1060) 368,1103 ; C22.2@362.19,1060 cw(c451.97,1060) 388.49,1123.49 ; C37.1@408.71,917.8 cw(c438.16,888.34) 438.16,930 ; C37.1@416,910.5 435.5,930 C24.2@573.5,930 ; C37.1@417.19,909.31 cw(c467.14,859.37) 467.14,930 ; v1@424.34,1119.34 ccw(c410.69,1105.69) 410.69,1125 ccw(c410.69,1144.31) v1@424.34,1130.66 ; C37.1@425.68,900.83 cw(c496.11,830.4) 496.11,930 ; v1@476.36,868.32 cw(c443.87,835.58) D3.2@490,835.58 ; D3.2@490,836.42 v1@490,874 ; 516.32,930 cw(c516.32,862.82) C24.2@563.83,910.32 ; C28.1@518.5,496.31 cw(c518.5,471.74) 535.88,489.12 ; C28.1@518.5,510 518.5,506.5 v1@558,467 ; C28.1@532.19,510 ccw(c573.69,510) 544.34,480.66 ; 542.64,482.36 ccw(c558,497.73) v1@558,476 ; 545.05,479.95 cw(c533.1,468) v1@550,468 ; 545.29,930 cw(c545.29,891.79) C24.2@572.31,918.81 ; C18.2@741.5,1170 785,1170 cw(c785,1208.11) C18.2@752.99,1187.43 ; C18.2@742.91,1180.91 ccw(c762.96,1193.87) 762.96,1170 ; C36.1@765.52,907.69 cw(c753.11,882.16) v1@781.5,882.16 ; C36.1@770.76,918.48 cw(c762.43,901.33) C36.1@781.5,901.33 ; v1@781.5,883.5 C36.1@781.5,920 ; C36.1@781.5,908.6 ccw(c819.6,908.6) v1@792.66,881.66
  Bottom Layer w15: C1.2@96.38,1095.11 ccw(c63.51,1127.98) v1@110,1127.98 ; v1@100.4,1135.4 cw(c77.24,1112.24) 110,1112.24 ; v1(105,1140) 125,1160 178.5,1160 C9.2@208.5,1190 ; v1@105,1146.5 ccw(c105,1162.19) 116.1,1151.1 ccw(c127.19,1140) v1@111.5,1140 ; C1.2@110,1091.5 v1@110,1135 ; C1.2@111.5,1090 U3.2@172.76,1090 ; C1.2@113.62,1077.88 cw(c142.88,1048.62) 142.88,1090 ; C1.2@113.62,1095.11 ccw(c125.96,1107.45) 125.96,1090 ; C9.2@196.32,1190 cw(c166.9,1190) 187.7,1169.2 cw(c208.5,1148.4) C9.2@208.5,1177.81 ; C23.2@343,1233 480,1370 ; C23.2@360.69,1230 cw(c410.64,1230) 375.32,1265.32 ; 400,360 D4.2@400,433.58 ; 400,389.83 ccw(c449.83,389.83) v1@414.6,354.6 ; 453.47,1343.47 cw(c497,1299.94) v1@497,1361.5 ; 470.5,1360.5 cw(c483.2,1347.8) v1@493.33,1362.63 ; 479.08,1369.08 cw(c497,1351.15) v1@497,1376.5 ; 483.29,1373.29 cw(c493.58,1363) v1@501.79,1375.02 ; v1@491.8,1364.1 ccw(c480,1355.25) 480,1370 ; v1@501.6,1363.4 cw(c517.52,1347.48) 517.52,1370 ; C15.2@593.08,1328.81 ccw(c574.25,1348.5) 601.5,1348.5 ; C15.2@601.5,1320 601.5,1348.5 ; C15.2@609.92,1328.81 cw(c628.74,1348.5) 601.5,1348.5 ; C35.1@773.46,994 840.96,1061.5 C33.1@860,1061.5 ; C35.1@773.46,1016.03 ccw(c773.46,1069.21) 811.07,1031.6 ; C35.1@791.55,997.94 cw(c825.72,997.94) 801.56,1022.1 ; 806.7,1027.23 cw(c860,973.93) C33.1@860,1049.31 ; 832.3,1052.84 cw(c860,1025.14) C33.1@860,1064.31 ; v1@994,761 1001.5,768.5 1001.5,786.5 C29.1@1028.25,813.25 ; v1@995.4,769.6 ccw(c980.7,784.3) 1001.5,784.3 ; 1008.25,793.25 ccw(c996.17,805.33) C29.1@1010.95,813.89 ; C27.1@1056,1320 1077.5,1298.5 1076.5,1298.5 v1(1175,1200) ; C27.1@1072.53,1303.47 cw(c1089.05,1320) 1065.68,1320 ccw(c1091.47,1320) 1073.23,1301.77 ; 1076.86,1298.14 ccw(c1053.5,1274.77) 1053.5,1307.82 cw(c1053.5,1272.35) 1078.57,1297.43 ; v1@1168.5,1200 ccw(c1152.81,1200) 1163.9,1211.1 ccw(c1175,1222.19) v1@1175,1206.5 ; 480,1370 580,1370 601.5,1348.5
  other v1: 1000,50 515,145 1240,270 1310,270 50,275 560,355 1050,405 558,468 895,525 482,874 754,1082 760,1325 260,1360 1181,1364
GY_X: U1.14 U5.1 | length 751.2
  Top Layer w10: U1.14@638.34,688.34 592.93,688.34 576,705.27 576,768.46 734.54,927 812,927 828,943 828,1056 773.61,1110.39 U5.1@669.21,1110.39
GY_Y: U1.15 U5.20 | length 366.9
  Top Layer w10: 551,758 551,770.54 669.21,888.76 U5.20@669.21,909.61 ; 551,766 551,700 582.35,668.65 U1.15@638.34,668.65
GY_Z: U1.13 U4.20 | length 776
  Top Layer w10: U1.13@638.34,708.02 638.34,805.34 737,904 827,904 854,931 854,1064.23 748.62,1169.61 U4.20@669.21,1169.61 ; 638.34,713.3 ccw(c645.58,713.3) U1.13@640.46,708.18 ; U1.13@640.31,708.02 637.33,711 629,711 638.34,720.34 U1.13@649.84,708.84 ; U1.13@649.51,709.16 cw(c648.13,707.78) U1.13@650.09,707.72
INV: C11.1 R6.2 U1.20 U6.1 | length 1124.5
  Top Layer w10: U1.20@638.34,570.23 694.32,570.23 v1(704.54,580.46) ; v1@838.72,196.45 ccw(c801.22,235) 855,235 ; v1(845,190) 855,200 855,235 ; v1@845.7,189.28 ccw(c824.26,211.31) 855,211.31 ; U6.1@916.42,264.41 884.41,264.41 855,235
  Bottom Layer w10: v1@703.84,581.16 cw(c725.17,559.83) 725.17,590 ; v1(704.54,580.46) 705,580 v1@705,576 ; v1@705,575 720,590 ; v1@708.83,588.37 ccw(c713.32,596.68) 720,590 ; v1@710.91,574.09 cw(c749.31,535.69) 749.31,590 ; 803.25,378.25 ccw(c774.78,406.72) R6.2@814.11,415.32 ; 816.18,391.18 ccw(c796.01,411.36) R6.2@823.88,417.45 ; R6.2@817.54,430.96 ccw(c791.08,457.42) 828.5,457.42 ; C11.1@818.12,479.62 cw(c793.05,454.55) 828.5,454.55 cw(c863.96,454.55) C11.1@838.89,479.62 ; C11.1@818.12,500.38 ccw(c794.27,524.24) 828,524.24 ; R6.2@826,401 795,370 795,210 815,190 v1(845,190) ; R6.2@826.54,420 828.5,421.97 C11.1@828.5,490 ; C11.1@828,503 828,537 775,590 720,590 ; 828,526.67 ccw(c865.17,526.67) C11.1@838.89,500.38 ; 828.5,447.92 ccw(c852.48,447.92) R6.2@835.53,430.96 ; v1@838.64,183.64 ccw(c823.27,168.27) 823.27,190 ccw(c823.27,211.73) v1@838.64,196.36
LED_BLU: R9.2 U1.16 | length 327.6
  Top Layer w8: R9.2@438.73,785.27 563.77,660.23 563.77,660 574.8,648.97 U1.16@638.34,648.97 ; R9.2@441.97,772.82 cw(c441.97,750.58) 457.7,766.3 ; R9.2@447.68,786.54 ccw(c472.36,786.54) R9.2@454.91,769.09 ; R9.2@455.68,786.54 ccw(c499.67,786.54) 468.57,755.43
NetC8_1: C8.1 U2.4 | length 160
  Top Layer w10: U2.4@197.24,352.6 231.1,352.6 C8.1@260,381.5 ; U2.4@207.68,347.09 cw(c220.98,333.78) 220.98,352.6 cw(c220.98,371.42) U2.4@207.68,358.11 ; C8.1@245.32,381.5 cw(c209.86,381.5) 234.93,356.43 cw(c260,331.36) C8.1@260,366.81
NetC9_1: C9.1 U3.4 | length 98.9
  Bottom Layer w10: C9.1@267.24,1185.75 C9.1@271.5,1190
  Bottom Layer w15: U3.4@267.24,1127.4 C9.1@267.24,1185.75 ; 267.24,1150.32 cw(c311.18,1150.32) C9.1@280.11,1181.38
NetC10_1: C10.1 D3.3 R7.1 R18.2 | length 705.2
  Top Layer w10: R7.1@391.01,632.46 ccw(c369.3,654.16) 400,654.16 ccw(c430.7,654.16) R7.1@408.99,632.46 ; R7.1@400,613.46 400,673 440,713 v1(437,716) ; 417.39,690.39 ccw(c391.79,716) v1@428,716
  Bottom Layer w10: C10.1@399.88,766.54 399.88,753.12 v1(437,716) 437,784 454,801 503,801 ; C10.1@404.23,758.17 ccw(c426.93,758.17) 410.88,742.12 ; v1@428,716 ccw(c406.27,716) 421.64,731.36 ccw(c437,746.73) v1@437,725 ; v1@430.64,722.36 ccw(c415.27,737.73) 437,737.73 ccw(c458.73,737.73) v1@443.36,722.36 ; D3.3@515.59,836.42 515.59,813.59 503,801 ; 541.7,783.3 cw(c500.36,741.97) R18.2@558.82,741.97 ; 558.77,766.23 cw(c534.51,741.97) R18.2@568.82,741.97 ; R18.2@571.54,740 571.54,753.46 524,801 503,801
NetC10_2: C10.2 D3.1 R8.1 R19.2 | length 855.1
  Top Layer w10: R8.1@322.98,632.46 ccw(c303.61,651.83) 331,651.83 ; R8.1@331,613.46 331,656 ; R8.1@340.86,632.55 cw(c363.8,656) 331,656 ; v1@382,716 cw(c360.27,716) 375.64,700.64 cw(c391,685.27) v1@391,707 ; v1(391,716) 331,656
  Bottom Layer w10: C10.2@364.31,774.86 cw(c377.24,774.95) C10.2@368.1,784.1 ; C10.2@369.96,749.53 380,739.5 ; C10.2@369.96,766.54 369.96,785.96 385,801 ; C10.2@373.81,756.14 ccw(c383.12,751.25) 375.68,743.81 ; C10.2@374.31,774.93 cw(c410.8,775.19) 385,801 ; 380,727.75 ccw(c392.9,727.75) v1@390.84,715.01 ; v1(391,716) 380,727 380,739.5 ; v1@392.44,724.88 cw(c394.8,739.49) 380,739.49 ; 448,832 cw(c457.72,822.29) D3.1@463.6,834.71 ; 450.65,834.65 cw(c461.59,823.7) D3.1@467.51,838.01 ; 453.84,833 cw(c453.84,819.94) D3.1@463.07,829.18 ; 454,847.87 ccw(c469.96,847.87) D3.1@458.67,836.59 ; 454,872.02 ccw(c494.1,872.02) D3.1@465.75,843.66 ; D3.1@458.04,842.04 cw(c464.17,835.91) D3.1@467.88,843.75 ; D3.1@464.41,836.42 460.99,833 449,833 ; 547.35,853.65 cw(c519.68,825.97) R19.2@558.82,825.97 ; 555.8,845.2 ccw(c571.54,860.94) R19.2@571.54,838.68 ; R19.2@574.27,826.73 546.5,854.5 546.5,874.5 516,905 470,905 454,889 454,838 449,833 ; 385,801 417,801 449,833
NetC10_3: C10.3 D3.5 R4.1 R5.8 | length 495
  Bottom Layer w10: C10.3@334.41,758.64 ccw(c352.43,757.14) 339.64,744.36 ; C10.3@340.04,766.54 340.04,743.96 362,722 R4.1@362,667.24 ; C10.3@344.37,757.81 ccw(c380.59,754.8) 354.89,729.11 ; 362,692.17 ccw(c390.43,692.17) R4.1@370.33,672.06 ; R4.1@366.5,667.24 R5.8@438.5,667.24 438.5,678.5 464.41,704.41 D3.5@464.41,763.58 ; R4.1@372.3,662.43 cw(c383.92,650.8) 383.92,667.24 cw(c383.92,683.69) R4.1@372.3,672.06 ; R5.8@432.7,662.43 ccw(c421.08,650.8) 421.08,667.24 ccw(c421.08,683.69) R5.8@432.7,672.06 ; R5.8@436.3,667.24 cw(c458.16,667.24) 442.7,682.7 ; R5.8@446.3,667.24 cw(c492.3,667.24) 459.77,699.77 ; 340.04,747.67 ccw(c329.54,747.67) 336.96,755.09 cw(c329.54,747.67) 340.04,747.67 ; 340.04,747.67 cw(c350.54,747.67) 343.12,755.09 ccw(c350.54,747.67) 340.04,747.67
NetC10_4: C10.4 D3.4 R4.2 R5.7 | length 538.8
  Bottom Layer w10: C10.4@307.04,755.09 cw(c299.62,747.67) 310.12,747.67 cw(c320.62,747.67) C10.4@313.19,755.09 ; C10.4@310.12,766.54 310.12,741.88 336,716 336,653.76 354.02,635.75 R5.7@438.5,635.75 460.75,635.75 475,650 475,688.18 491,704.19 491,739 D3.4@515.59,763.58 ; 341.75,648.02 ccw(c357.58,663.85) R4.2@363.66,642.3 ; R4.2@372.3,630.93 cw(c383.92,619.3) 383.92,635.75 cw(c383.92,652.19) R4.2@372.3,640.56 ; R5.7@432.7,630.93 ccw(c421.08,619.3) 421.08,635.75 ccw(c421.08,652.19) R5.7@432.7,640.56 ; R5.7@444.3,630.93 cw(c455.93,619.3) 455.93,635.75 cw(c455.93,652.19) R5.7@444.3,640.56 ; 502.28,750.28 cw(c515.59,736.97) D3.4@515.59,755.79
NetC12_1: C12.1 C13.1 C20.1 C21.1 L1.2 U4.9 U4.19 U5.9 U5.19 | length 2175.9
  Top Layer w8: C20.1@303.46,1021.54 C20.1@325,1021.54 ; C21.1@415,1023.5 C21.1@426.02,1034.53 ; C13.1@415,1296.5 C13.1@416.97,1294.53
  Top Layer w9: C13.1@415,1299.53 U4.9@539.29,1299.53 ; C13.1@424.37,1305.87 ccw(c439.68,1321.18) C13.1@439.68,1299.53 ; C13.1@430.74,1290.76 cw(c451.91,1269.59) 451.91,1299.53 ; C13.1@430.74,1312.23 ccw(c461.41,1342.91) 461.41,1299.53
  Top Layer w10: C21.1@409.62,1018.12 cw(c384.55,993.05) 420,993.05 cw(c455.45,993.05) 430.38,1018.12 cw(c482.07,966.44) 482.07,1039.53 ; C21.1@415,1023.5 431.02,1039.53 U5.9@539.29,1039.53 ; C13.1@415,1296.5 428.5,1296.5 463,1262 463,1167 490,1140 640,1140 649.53,1149.53 U4.19@649.53,1169.61 ; C21.1@420,1028.5 420,981 556,845 600,845 649.53,894.53 U5.19@649.53,909.61 ; C13.1@420,1286.81 cw(c420,1242.9) 451.05,1273.95 ; C21.1@423.31,1025.19 cw(c457.92,990.58) 457.92,1039.53 ; C13.1@434.68,1301.5 ccw(c461.68,1301.5) 442.59,1282.41 ; 645.26,890.26 ccw(c634.78,900.75) U5.19@649.61,900.75
  Top Layer w15: L1.2@209.89,1161.38 cw(c189.09,1140.58) 218.5,1140.58 cw(c247.92,1140.58) L1.2@227.12,1161.38 ; L1.2@215.69,1170 cw(c245.11,1170) 224.3,1190.8 ; L1.2@230.69,1170 cw(c296.32,1170) 249.91,1216.41 ; 248.07,1076.93 ccw(c326.06,1154.93) C20.1@326.06,1044.63 ; 261.72,1258.72 cw(c326.06,1194.38) C12.1@326.06,1285.37 ; 273.67,1051.33 ccw(c326.06,1103.72) C20.1@326.06,1029.63 ; 287.33,1284.33 cw(c326.06,1245.6) C12.1@326.06,1300.37 ; 299.28,1025.72 ccw(c326.06,1052.5) C20.1@326.06,1014.63 ; C20.1@309.47,1019.32 ccw(c298.47,1014.53) 298.47,1026.54 ; C20.1@309.47,1033.75 cw(c298.47,1038.54) 298.47,1026.54 ; C20.1@330,1026.54 298.46,1026.54 ; C12.1@330,1303.46 306.46,1303.46 250,1247 250,1216.5 218.5,1185 L1.2@218.5,1170 218.5,1106.5 298.46,1026.54
NetC14_5: C14.5 D4.5 R4.3 R5.6 | length 554.5
  Bottom Layer w10: C14.5@213.46,535 320,535 337,552 337,594 347.25,604.25 R4.3@366.5,604.25 R5.6@438.5,604.25 460.75,604.25 469.17,595.83 469.17,550 D4.5@425.59,506.42 ; C14.5@224.91,531.81 cw(c232.62,524.09) 232.62,535 ; C14.5@224.91,537.96 ccw(c232.05,545.1) 232.05,535 ; R4.3@360.7,599.44 ccw(c349.07,587.81) 349.07,604.25 ccw(c349.07,620.7) R4.3@360.7,609.07 ; R4.3@372.3,599.44 cw(c383.92,587.81) 383.92,604.25 cw(c383.92,620.7) R4.3@372.3,609.07 ; D4.5@425.59,514.21 ccw(c425.59,533.03) 438.9,519.72 ; R5.6@432.7,599.44 ccw(c421.08,587.81) 421.08,604.25 ccw(c421.08,620.7) R5.6@432.7,609.07 ; R5.6@444.3,599.44 cw(c455.93,587.81) 455.93,604.25 cw(c455.93,620.7) R5.6@444.3,609.07
NetC14_6: C14.6 D4.4 R4.4 R5.5 | length 430.6
  Bottom Layer w10: C14.6@213.46,504.96 320,505 371.5,556.5 371.5,572.76 405,572.76 ; C14.6@224.91,501.88 cw(c232.43,494.36) 232.43,505 ; C14.6@224.91,508.04 ccw(c232.24,515.37) 232.24,505 ; R4.4@364.68,566.55 cw(c359.94,556.01) 371.5,556.01 ; R4.4@372.3,567.94 cw(c383.92,556.31) 383.92,572.76 cw(c383.92,589.2) R4.4@372.3,577.57 ; D4.4@374.41,506.42 374.41,514.41 405,545 405,572.76 ; D4.4@376.3,512.32 cw(c385.9,512.32) D4.4@379.11,519.11 ; R5.5@432.7,567.94 ccw(c421.08,556.31) 421.08,572.76 ccw(c421.08,589.2) R5.5@432.7,577.57 ; R5.5@438.5,572.76 405,572.76
NetC15_1: C15.1 U4.12 | length 251.3
  Top Layer w10: v1(490,1270) 490,1260 509.53,1240.47 U4.12@539.29,1240.47 ; v1@498.68,1267.61 ccw(c520.62,1261.57) 504.53,1245.47
  Bottom Layer w10: v1(490,1270) 538.5,1318.5 C15.1@538.5,1320 ; v1@490,1279 ccw(c490,1300.73) 505.36,1285.36 ccw(c520.73,1270) v1@499,1270 ; 512.38,1292.38 ccw(c484.75,1320) C15.1@523.82,1320 ; 515.99,1295.99 cw(c538.5,1273.47) C15.1@538.5,1305.32
NetC16_1: C16.1 U4.15 | length 279.9
  Top Layer w10: v1(495,1175) 500.39,1169.61 U4.15@570.79,1169.61 ; v1@501.36,1181.36 ccw(c529.75,1209.75) 529.75,1169.61
  Bottom Layer w10: v1@495,1176.5 C16.1@538.5,1220 ; v1@495,1184 ccw(c495,1202.12) 507.81,1189.31 ; v1@504,1175 cw(c529.34,1175) 511.42,1192.92 ; 506.36,1187.86 ccw(c464.22,1230) C16.1@523.82,1230 ; 523.44,1204.93 ccw(c498.37,1230) C16.1@533.82,1230
NetC17_1: C17.1 U4.24 | length 310.1
  Top Layer w8: U4.24@700.71,1260.16 747.16,1260.16 v1(759,1272) ; U4.24@706.27,1260.16 ccw(c706.27,1324.73) v1@751.93,1279.07 ; 725.58,1260.16 ccw(c725.58,1305.42) v1@757.59,1273.41 ; 744.89,1260.16 ccw(c744.89,1286.1) v1@763.24,1267.76
  Bottom Layer w10: C17.1@680,1258.5 745.5,1258.5 v1(759,1272) ; C17.1@690.38,1248.12 cw(c715.45,1223.05) 715.45,1258.5 cw(c715.45,1293.96) C17.1@690.38,1268.89
NetC18_1: C18.1 U4.22 | length 425.8
  Top Layer w8: U4.22@700.71,1220.79 U4.22@701.5,1220 ; U4.22@702.5,1221 v1@760,1221 ; U4.22@714.13,1221 ccw(c714.13,1275.87) v1@752.93,1237.07 ; 733.44,1221 ccw(c733.44,1256.56) v1@758.59,1231.41 ; v1@759,1220 v1@760,1221 ; v1(760,1230) v1@760,1221
  Bottom Layer w8: C18.1@678.5,1170 678.5,1188.5 710,1220 ; C18.1@678.5,1195.69 ccw(c678.5,1213.02) 690.76,1200.76 ; C18.1@686.19,1180.2 cw(c722.52,1181.12) 696.82,1206.82 ; C18.1@694.18,1180.4 cw(c748.22,1181.78) 710,1220 ; 711.72,1220 ccw(c711.72,1278.28) v1@752.93,1237.07 ; 731.03,1220 ccw(c731.03,1258.97) v1@758.59,1231.41 ; v1(760,1230) 760,1221 759,1220 710,1220
NetC22_1: C22.1 U5.12 | length 271.1
  Top Layer w10: v1(475,1005) 495,1005 ; v1@481.74,999.03 cw(c495,987.28) 495,1005 ; v1@481.74,1010.97 ccw(c495,1022.72) 495,1005 ; U5.12@539.29,980.47 519.53,980.47 495,1005
  Bottom Layer w10: C22.1@411.5,1045.31 cw(c411.5,1009.86) 436.56,1034.93 cw(c461.63,1060) C22.1@426.18,1060 ; C22.1@411.5,1060 v1@466.5,1005 ; 445.12,1026.38 ccw(c475,1056.26) v1@475,1014
NetC23_1: C23.1 U5.6 | length 454.1
  Top Layer w10: v1(490,1105) 495,1110 570.39,1110 U5.6@570.79,1110.39 ; v1@496.36,1098.64 cw(c523.8,1071.2) 523.8,1110
  Bottom Layer w10: C23.1@406.18,1230 ccw(c445.25,1230) 417.62,1202.38 ; C23.1@411.5,1230 411.5,1208.5 490,1130 v1(490,1105) ; C23.1@416.18,1230 ccw(c479.39,1230) 434.69,1185.31 ; C23.1@426.18,1230 ccw(c513.53,1230) 451.76,1168.24 ; v1@483.64,1111.36 ccw(c468.27,1126.73) 490,1126.73 ccw(c511.73,1126.73) v1@496.36,1111.36
NetC24_1: C24.1 U5.15 | length 207.7
  Top Layer w10: U5.15@570.79,909.61 570.79,881.21 v1(580,872)
  Bottom Layer w10: v1(580,872) 612,872 631.5,891.5 C24.1@631.5,930 ; v1@586.36,865.64 cw(c601.73,850.27) 601.73,872 cw(c601.73,893.73) v1@586.36,878.36 ; C24.1@626.11,909.62 cw(c613.11,896.62) 631.5,896.62 ; 631.5,891.06 cw(c647.92,891.06) C24.1@641.89,906.34
NetC25_1: C25.1 U5.24 | length 358.5
  Top Layer w8: U5.24@700.71,1000.16 716.16,1000.16 740,1024 v1@740,1053 ; U5.24@709.57,1001.08 ccw(c709.57,1019.21) 722.39,1006.39 ; v1@734.93,1038.93 cw(c722.69,1026.69) 740,1026.69 ; 740,1023.91 cw(c756.33,1023.91) v1@747.44,1037.61
  Bottom Layer w10: C25.1@635,1048.5 655,1048.5 659.5,1053 v1@740,1053 ; C25.1@640.31,1045.19 cw(c659.16,1026.34) 659.16,1053 ; C25.1@647.38,1038.12 cw(c683.31,1002.2) 683.31,1053 ; C25.1@647.38,1058.89 ccw(c661.6,1073.1) 661.6,1053 ; 703.37,1053 cw(c703.37,1007.37) v1@735.64,1039.64 ; 727.51,1053 cw(c727.51,1031.51) v1@742.71,1046.71
  other v1: 742,1046
NetC26_1: C26.1 U5.22 | length 183.2
  Top Layer w8: U5.22@700.71,960.79 778.28,960.79 C26.1@786,968.5 ; 729.5,960.79 ccw(c729.5,1025) C26.1@774.91,979.59 ; 748.82,960.79 ccw(c748.82,1005.69) C26.1@780.57,973.94 ; C26.1@766.76,960.79 cw(c766.76,949.27) C26.1@774.91,957.41
NetC29_2: C29.2 R15.2 U1.5 X1.3 | length 547.9
  Top Layer w10: U1.5@829.28,759.2 829.28,811.6 v1(839.7,822.02)
  Bottom Layer w15: v1@844,825 844,833 862,851 R15.2@862,862 ; v1@846.2,822.02 cw(c878.02,822.02) 855.52,844.52 ; R15.2@860,866.54 878.54,866.54 893,881 ; R15.2@866.05,875.9 ccw(c875.79,898.21) 893,881 ; X1.3@929.95,899.25 cw(c893,927.54) 893,881 ; X1.3@932.01,877.43 cw(c879.14,818.24) C29.2@958.5,818.24 ; X1.3@942.01,888.61 cw(c909.08,851.76) 958.5,851.76 ; C29.2@949.89,828.62 ccw(c929.09,849.42) 958.5,849.42 ccw(c987.92,849.42) C29.2@967.12,828.62 ; C29.2@958.5,820 958.5,885.51 X1.3@942.76,901.26 922.5,881 893,881
NetC31_1: C31.1 C32.1 L3.2 U8.6 | length 306.7
  Top Layer w8: v1(825,1135) 841.26,1151.26 ; v1@825.35,1144.99 ccw(c826.1,1166.42) 841.26,1151.26 ; v1@834.99,1135.35 cw(c856.42,1136.1) 841.26,1151.26 ; U8.6@870.25,1146.43 ccw(c858.6,1134.78) 858.6,1151.26 ccw(c858.6,1167.74) U8.6@870.25,1156.09 ; U8.6@886.79,1151.26 841.26,1151.26
  Bottom Layer w8: v1(825,1135) v1@836.5,1135 ; C31.1@901.5,1166.5 C31.1@901.5,1180
  Bottom Layer w10: v1@829.52,1142.78 ccw(c836.57,1154.93) 846.5,1145 ; v1@836.5,1135 846.5,1145 ; 883.95,1148.95 ccw(c852.9,1180) C31.1@896.81,1180 ; 892.41,1157.41 cw(c911.5,1138.32) C31.1@911.5,1165.32 ; C31.1@901.5,1166.5 880,1145 846.5,1145
NetC33_2: C33.2 R15.1 U1.6 X1.1 | length 928.5
  Top Layer w10: v1@805.64,839.64 cw(c795.48,829.48) 809.84,829.48 ; v1@809.06,840 809.84,839.22 U1.6@809.84,761.42 ; 809.84,819.06 cw(c838.94,819.06) v1@818.36,839.64
  Bottom Layer w10: C33.2@856,998.5 C33.2@859.21,998.5
  Bottom Layer w12: v1@806.34,851.66 ccw(c773.37,884.63) 820,884.63 ; v1@810,846 v1(812,846) 820,854 820,905 R15.1@848.46,933.46 ; 821.7,906.7 cw(c858.03,870.37) R15.1@858.03,921.75
  Bottom Layer w15: R15.1@848.46,933.46 R15.1@860,933.46 C33.2@860,1008.5 ; C33.2@851.38,989.89 cw(c830.58,969.09) 860,969.09 cw(c889.42,969.09) 868.62,989.89 cw(c889.42,969.09) 889.42,998.5 cw(c889.42,1027.92) C33.2@868.62,1007.12 ; R15.1@852.78,940.69 ccw(c835.34,958.13) 860,958.13 ccw(c884.66,958.13) R15.1@867.22,940.69 ; C33.2@860,998.5 891.5,998.5 915,975 995,975 1037.24,1017.24 ; 1009.84,989.84 ccw(c974.12,1025.56) X1.1@1021.97,1041.76 ; 1026.92,1006.92 ccw(c999.64,1034.2) X1.1@1036.18,1046.57 ; X1.1@1028.47,1033.41 cw(c1017.98,1017.25) 1037.24,1017.25 ; X1.1@1037.24,1058.74 1037.24,1017.24 ; X1.1@1043.99,1023.99 ccw(c1025.15,1042.83) X1.1@1050.39,1051.38 ; X1.1@1046.02,1033.41 ccw(c1056.51,1017.25) 1037.24,1017.25